# EAGLE board Qwiic_RFID_Tag-Panel (EAGLE 9.6.2), part 1 of 3
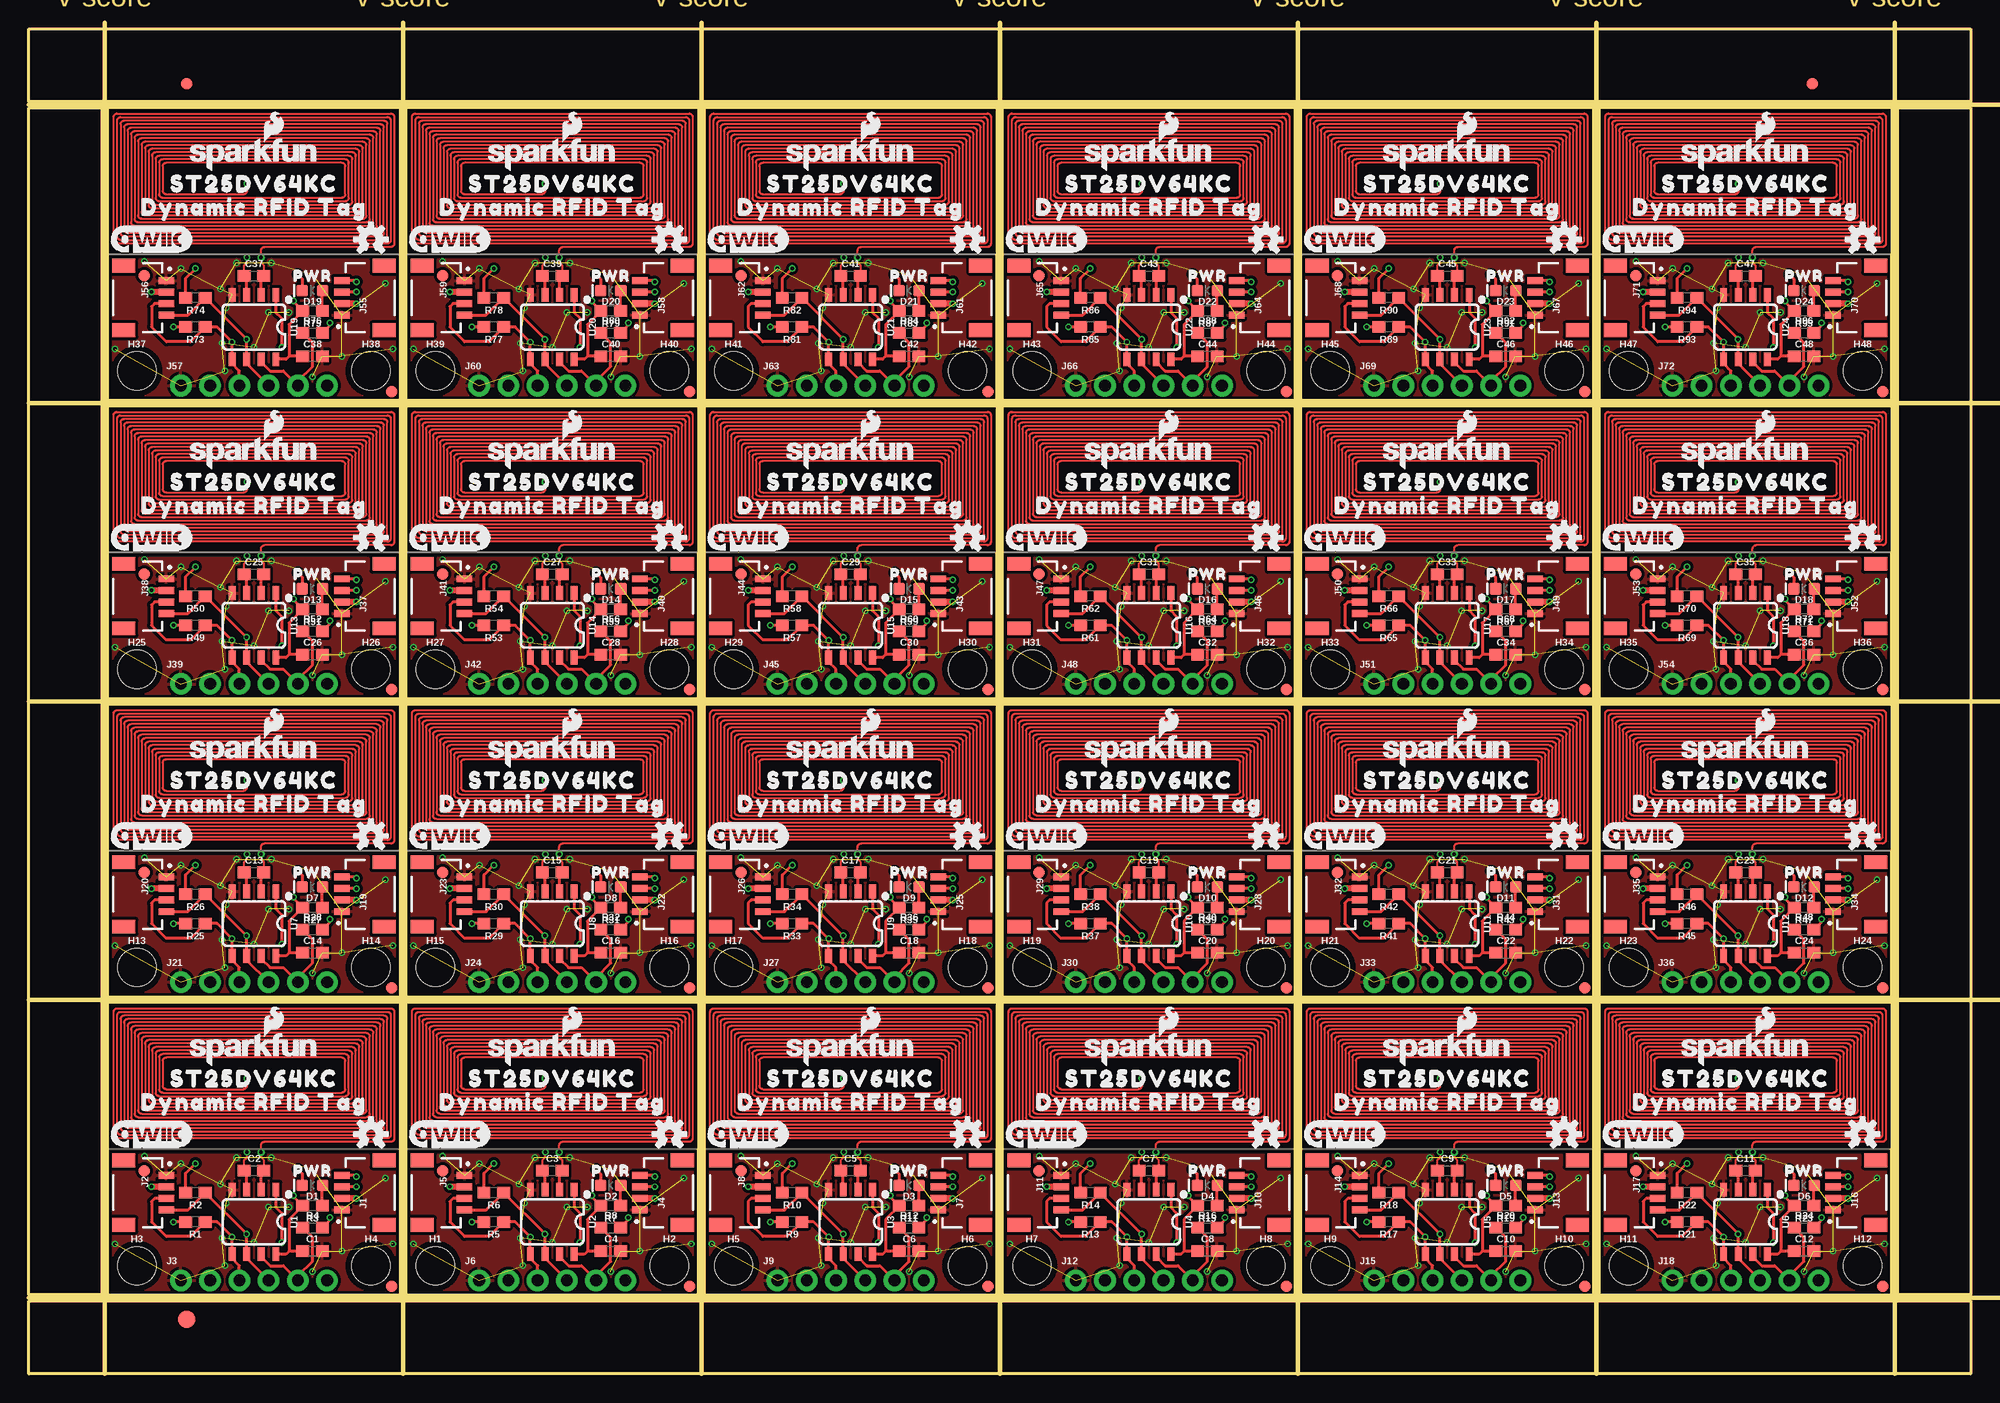
[diagram p0: board, top side]
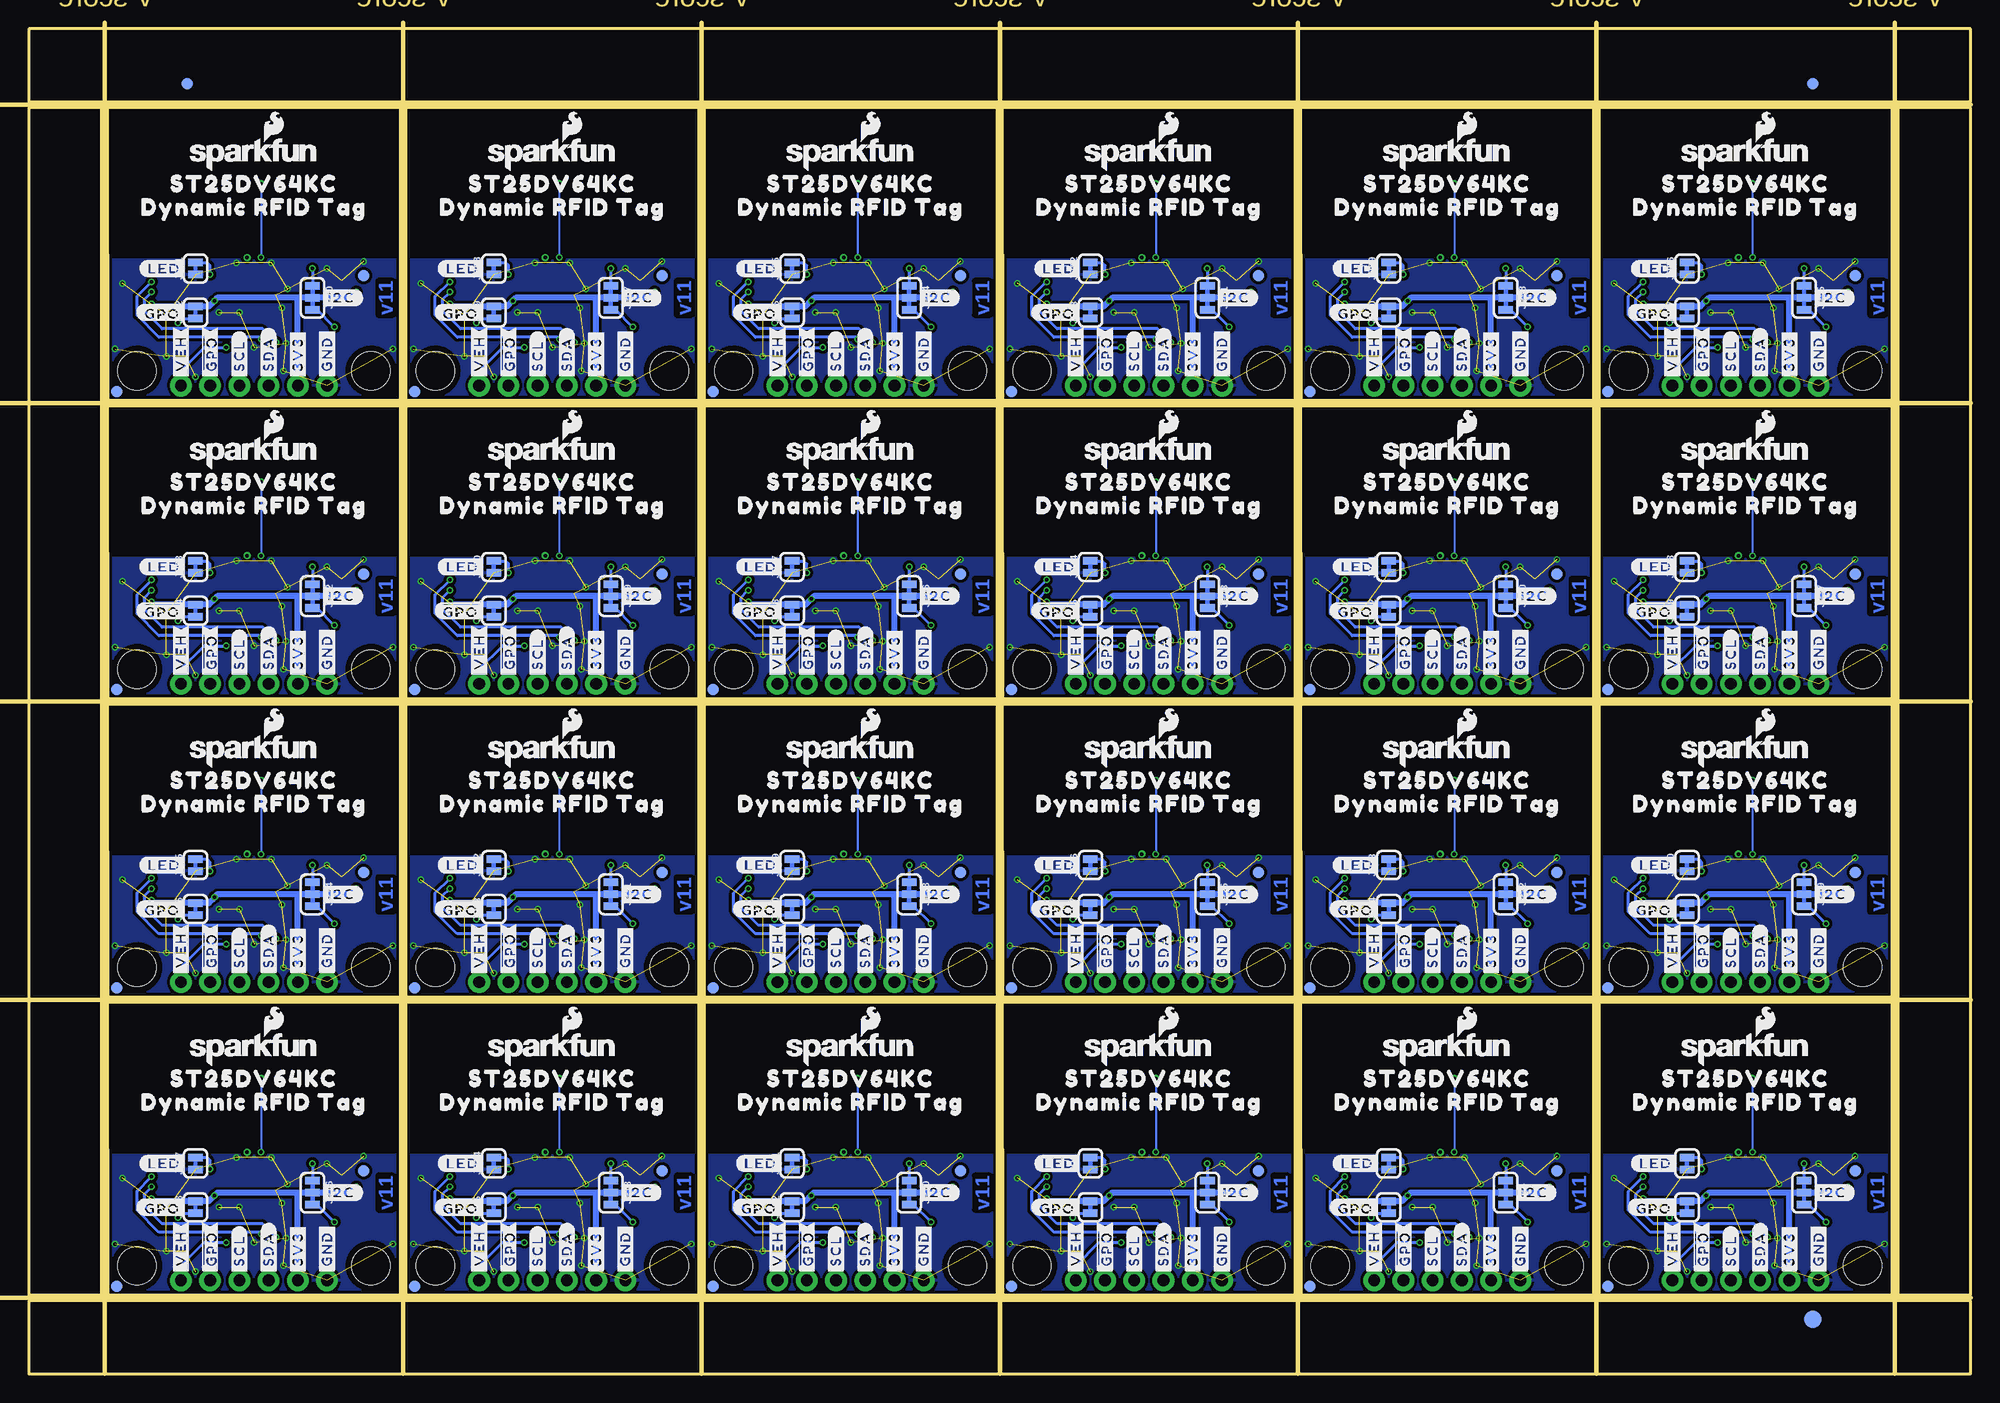
[diagram p1: board, bottom side, seen from below]

Size 168.66 x 116.84 mm. Coordinates in mm from the lower left corner, seen from the top.
Outline: 6.86,6.86 32.24,6.86 32.26,32.26 6.86,32.26 6.86,6.86
Outline: 32.77,6.86 58.15,6.86 58.17,32.26 32.77,32.26 32.77,6.86
Outline: 58.67,6.86 84.05,6.86 84.07,32.26 58.67,32.26 58.67,6.86
Outline: 84.58,6.86 109.96,6.86 109.98,32.26 84.58,32.26 84.58,6.86
Outline: 110.49,6.86 135.87,6.86 135.89,32.26 110.49,32.26 110.49,6.86
Outline: 136.4,6.86 161.78,6.86 161.8,32.26 136.4,32.26 136.4,6.86
Outline: 6.86,32.77 32.24,32.77 32.26,58.17 6.86,58.17 6.86,32.77
Outline: 32.77,32.77 58.15,32.77 58.17,58.17 32.77,58.17 32.77,32.77
Outline: 58.67,32.77 84.05,32.77 84.07,58.17 58.67,58.17 58.67,32.77
Outline: 84.58,32.77 109.96,32.77 109.98,58.17 84.58,58.17 84.58,32.77
Outline: 110.49,32.77 135.87,32.77 135.89,58.17 110.49,58.17 110.49,32.77
Outline: 136.4,32.77 161.78,32.77 161.8,58.17 136.4,58.17 136.4,32.77
Outline: 6.86,58.67 32.24,58.67 32.26,84.07 6.86,84.07 6.86,58.67
Outline: 32.77,58.67 58.15,58.67 58.17,84.07 32.77,84.07 32.77,58.67
Outline: 58.67,58.67 84.05,58.67 84.07,84.07 58.67,84.07 58.67,58.67
Outline: 84.58,58.67 109.96,58.67 109.98,84.07 84.58,84.07 84.58,58.67
Outline: 110.49,58.67 135.87,58.67 135.89,84.07 110.49,84.07 110.49,58.67
Outline: 136.4,58.67 161.78,58.67 161.8,84.07 136.4,84.07 136.4,58.67
Outline: 6.86,84.58 32.24,84.58 32.26,109.98 6.86,109.98 6.86,84.58
Outline: 32.77,84.58 58.15,84.58 58.17,109.98 32.77,109.98 32.77,84.58
Outline: 58.67,84.58 84.05,84.58 84.07,109.98 58.67,109.98 58.67,84.58
Outline: 84.58,84.58 109.96,84.58 109.98,109.98 84.58,109.98 84.58,84.58
Outline: 110.49,84.58 135.87,84.58 135.89,109.98 110.49,109.98 110.49,84.58
Outline: 136.4,84.58 161.78,84.58 161.8,109.98 136.4,109.98 136.4,84.58
Outline: 0,6.35 168.66,6.35 168.66,0 0,0 0,6.35
Outline: 162.31,109.98 168.66,109.98 168.66,6.86 162.31,6.86 162.31,109.98
Outline: 0,116.84 168.66,116.84 168.66,110.49 0,110.49 0,116.84
Outline: 0,109.98 6.35,109.98 6.35,6.86 0,6.86 0,109.98
Copper layers (1*16): Top 0.035mm / dielectric 1.5mm / Bottom 0.035mm
Design rules "Qwiic_RFID_Tag": minimum track width 5mil, minimum drill 0.3mm, track to track 5mil, track to pad 5mil, pad to pad 5mil, via to via 5mil, smd to smd 5mil, copper to edge 7mil, drill to drill 7mil, minimum pad ring 5mil, minimum via ring 5mil, stop-mask expansion 2.5mil, vias tented up to drill 25mil, thermal gap 10mil
Milling: 12 lines

## Footprints (pad centres in the part's own frame; a part is rotated, then mirrored left to right if it is on the bottom)
0603 = smd 1.1 x 1: 1 -0.85,0; 2 0.85,0
LED-0603 = smd 1 x 1: A -0.877,0; C 0.877,0
FIDUCIAL-1X2 = smd 1 x 1: 1 0,0
FIDUCIAL-1.5X3 = smd 1.5 x 1.5: 1 0,0
STAND-OFF = hole 3.302: 0,0
JST04_1MM_RA = smd 0.6 x 1.35: 1 -1.5,0; 2 -0.5,0; 3 0.5,0; 4 1.5,0 | smd 1.2 x 2: NC1 2.8,-3.675; NC2 -2.8,-3.675
1X06_NO_SILK = drill 1.016 pad 1.88: 1 0,0; 2 2.54,0; 3 5.08,0; 4 7.62,0; 5 10.16,0; 6 12.7,0
SMT-JUMPER_3_2-NC_TRACE_SILK = smd 0.66 x 1.27: 1 -1.041,0; 2 0,0; 3 1.041,0
SMT-JUMPER_2_NC_TRACE_SILK = smd 0.66 x 1.27: 1 -0.521,0; 2 0.521,0
PCB_COIL_4UH_B = drill 0.305 pad 0.61: IN1 -0.61,6.096; IN2 0.61,-0.305
SO08 = smd 0.6 x 1.2: 1 -1.905,-2.8; 2 -0.635,-2.8; 3 0.635,-2.8; 4 1.905,-2.8; 5 1.905,2.8; 6 0.635,2.8; 7 -0.635,2.8; 8 -1.905,2.8

## Placement (x,y rotation side)
C1  0.1uF  [0603]  24.64,10.67 0 top
C2  4.7pF  [0603]  19.56,17.65 0 top
C3  4.7pF  [0603]  45.47,17.65 0 top
C4  0.1uF  [0603]  50.55,10.67 0 top
C5  4.7pF  [0603]  71.37,17.65 0 top
C6  0.1uF  [0603]  76.45,10.67 0 top
C7  4.7pF  [0603]  97.28,17.65 0 top
C8  0.1uF  [0603]  102.36,10.67 0 top
C9  4.7pF  [0603]  123.19,17.65 0 top
C10  0.1uF  [0603]  128.27,10.67 0 top
C11  4.7pF  [0603]  149.1,17.65 0 top
C12  0.1uF  [0603]  154.18,10.67 0 top
C13  4.7pF  [0603]  19.56,43.56 0 top
C14  0.1uF  [0603]  24.64,36.58 0 top
C15  4.7pF  [0603]  45.47,43.56 0 top
C16  0.1uF  [0603]  50.55,36.58 0 top
C17  4.7pF  [0603]  71.37,43.56 0 top
C18  0.1uF  [0603]  76.45,36.58 0 top
C19  4.7pF  [0603]  97.28,43.56 0 top
C20  0.1uF  [0603]  102.36,36.58 0 top
C21  4.7pF  [0603]  123.19,43.56 0 top
C22  0.1uF  [0603]  128.27,36.58 0 top
C23  4.7pF  [0603]  149.1,43.56 0 top
C24  0.1uF  [0603]  154.18,36.58 0 top
C25  4.7pF  [0603]  19.56,69.47 0 top
C26  0.1uF  [0603]  24.64,62.48 0 top
C27  4.7pF  [0603]  45.47,69.47 0 top
C28  0.1uF  [0603]  50.55,62.48 0 top
C29  4.7pF  [0603]  71.37,69.47 0 top
C30  0.1uF  [0603]  76.45,62.48 0 top
C31  4.7pF  [0603]  97.28,69.47 0 top
C32  0.1uF  [0603]  102.36,62.48 0 top
C33  4.7pF  [0603]  123.19,69.47 0 top
C34  0.1uF  [0603]  128.27,62.48 0 top
C35  4.7pF  [0603]  149.1,69.47 0 top
C36  0.1uF  [0603]  154.18,62.48 0 top
C37  4.7pF  [0603]  19.56,95.38 0 top
C38  0.1uF  [0603]  24.64,88.39 0 top
C39  4.7pF  [0603]  45.47,95.38 0 top
C40  0.1uF  [0603]  50.55,88.39 0 top
C41  4.7pF  [0603]  71.37,95.38 0 top
C42  0.1uF  [0603]  76.45,88.39 0 top
C43  4.7pF  [0603]  97.28,95.38 0 top
C44  0.1uF  [0603]  102.36,88.39 0 top
C45  4.7pF  [0603]  123.19,95.38 0 top
C46  0.1uF  [0603]  128.27,88.39 0 top
C47  4.7pF  [0603]  149.1,95.38 0 top
C48  0.1uF  [0603]  154.18,88.39 0 top
D1  RED  [LED-0603]  24.64,16.38 180 top
D2  RED  [LED-0603]  50.55,16.38 180 top
D3  RED  [LED-0603]  76.45,16.38 180 top
D4  RED  [LED-0603]  102.36,16.38 180 top
D5  RED  [LED-0603]  128.27,16.38 180 top
D6  RED  [LED-0603]  154.18,16.38 180 top
D7  RED  [LED-0603]  24.64,42.29 180 top
D8  RED  [LED-0603]  50.55,42.29 180 top
D9  RED  [LED-0603]  76.45,42.29 180 top
D10  RED  [LED-0603]  102.36,42.29 180 top
D11  RED  [LED-0603]  128.27,42.29 180 top
D12  RED  [LED-0603]  154.18,42.29 180 top
D13  RED  [LED-0603]  24.64,68.2 180 top
D14  RED  [LED-0603]  50.55,68.2 180 top
D15  RED  [LED-0603]  76.45,68.2 180 top
D16  RED  [LED-0603]  102.36,68.2 180 top
D17  RED  [LED-0603]  128.27,68.2 180 top
D18  RED  [LED-0603]  154.18,68.2 180 top
D19  RED  [LED-0603]  24.64,94.11 180 top
D20  RED  [LED-0603]  50.55,94.11 180 top
D21  RED  [LED-0603]  76.45,94.11 180 top
D22  RED  [LED-0603]  102.36,94.11 180 top
D23  RED  [LED-0603]  128.27,94.11 180 top
D24  RED  [LED-0603]  154.18,94.11 180 top
E$1  [FIDUCIAL-1X2]  13.72,112.08 0 top
E$2  [FIDUCIAL-1X2]  13.72,112.08 0 bottom
E$3  [FIDUCIAL-1X2]  154.88,112.08 0 top
E$4  [FIDUCIAL-1X2]  154.88,112.08 0 bottom
E$5  [FIDUCIAL-1.5X3]  13.72,4.76 0 top
E$6  [FIDUCIAL-1.5X3]  13.72,4.76 0 bottom
FD1  FIDUCIAL1X2  [FIDUCIAL-1X2]  10.03,17.65 0 bottom
FD2  FIDUCIAL1X2  [FIDUCIAL-1X2]  10.03,17.65 0 top
FD3  FIDUCIAL1X2  [FIDUCIAL-1X2]  31.5,7.62 0 bottom
FD4  FIDUCIAL1X2  [FIDUCIAL-1X2]  31.5,7.62 0 top
FD5  FIDUCIAL1X2  [FIDUCIAL-1X2]  35.94,17.65 0 bottom
FD6  FIDUCIAL1X2  [FIDUCIAL-1X2]  35.94,17.65 0 top
FD7  FIDUCIAL1X2  [FIDUCIAL-1X2]  57.4,7.62 0 bottom
FD8  FIDUCIAL1X2  [FIDUCIAL-1X2]  57.4,7.62 0 top
FD9  FIDUCIAL1X2  [FIDUCIAL-1X2]  61.85,17.65 0 bottom
FD10  FIDUCIAL1X2  [FIDUCIAL-1X2]  61.85,17.65 0 top
FD11  FIDUCIAL1X2  [FIDUCIAL-1X2]  83.31,7.62 0 bottom
FD12  FIDUCIAL1X2  [FIDUCIAL-1X2]  83.31,7.62 0 top
FD13  FIDUCIAL1X2  [FIDUCIAL-1X2]  87.76,17.65 0 bottom
FD14  FIDUCIAL1X2  [FIDUCIAL-1X2]  87.76,17.65 0 top
FD15  FIDUCIAL1X2  [FIDUCIAL-1X2]  109.22,7.62 0 bottom
FD16  FIDUCIAL1X2  [FIDUCIAL-1X2]  109.22,7.62 0 top
FD17  FIDUCIAL1X2  [FIDUCIAL-1X2]  113.67,17.65 0 bottom
FD18  FIDUCIAL1X2  [FIDUCIAL-1X2]  113.67,17.65 0 top
FD19  FIDUCIAL1X2  [FIDUCIAL-1X2]  135.13,7.62 0 bottom
FD20  FIDUCIAL1X2  [FIDUCIAL-1X2]  135.13,7.62 0 top
FD21  FIDUCIAL1X2  [FIDUCIAL-1X2]  139.57,17.65 0 bottom
FD22  FIDUCIAL1X2  [FIDUCIAL-1X2]  139.57,17.65 0 top
FD23  FIDUCIAL1X2  [FIDUCIAL-1X2]  161.04,7.62 0 bottom
FD24  FIDUCIAL1X2  [FIDUCIAL-1X2]  161.04,7.62 0 top
FD25  FIDUCIAL1X2  [FIDUCIAL-1X2]  10.03,43.56 0 bottom
FD26  FIDUCIAL1X2  [FIDUCIAL-1X2]  10.03,43.56 0 top
FD27  FIDUCIAL1X2  [FIDUCIAL-1X2]  31.5,33.53 0 bottom
FD28  FIDUCIAL1X2  [FIDUCIAL-1X2]  31.5,33.53 0 top
FD29  FIDUCIAL1X2  [FIDUCIAL-1X2]  35.94,43.56 0 bottom
FD30  FIDUCIAL1X2  [FIDUCIAL-1X2]  35.94,43.56 0 top
FD31  FIDUCIAL1X2  [FIDUCIAL-1X2]  57.4,33.53 0 bottom
FD32  FIDUCIAL1X2  [FIDUCIAL-1X2]  57.4,33.53 0 top
FD33  FIDUCIAL1X2  [FIDUCIAL-1X2]  61.85,43.56 0 bottom
FD34  FIDUCIAL1X2  [FIDUCIAL-1X2]  61.85,43.56 0 top
FD35  FIDUCIAL1X2  [FIDUCIAL-1X2]  83.31,33.53 0 bottom
FD36  FIDUCIAL1X2  [FIDUCIAL-1X2]  83.31,33.53 0 top
FD37  FIDUCIAL1X2  [FIDUCIAL-1X2]  87.76,43.56 0 bottom
FD38  FIDUCIAL1X2  [FIDUCIAL-1X2]  87.76,43.56 0 top
FD39  FIDUCIAL1X2  [FIDUCIAL-1X2]  109.22,33.53 0 bottom
FD40  FIDUCIAL1X2  [FIDUCIAL-1X2]  109.22,33.53 0 top
FD41  FIDUCIAL1X2  [FIDUCIAL-1X2]  113.67,43.56 0 bottom
FD42  FIDUCIAL1X2  [FIDUCIAL-1X2]  113.67,43.56 0 top
FD43  FIDUCIAL1X2  [FIDUCIAL-1X2]  135.13,33.53 0 bottom
FD44  FIDUCIAL1X2  [FIDUCIAL-1X2]  135.13,33.53 0 top
FD45  FIDUCIAL1X2  [FIDUCIAL-1X2]  139.57,43.56 0 bottom
FD46  FIDUCIAL1X2  [FIDUCIAL-1X2]  139.57,43.56 0 top
FD47  FIDUCIAL1X2  [FIDUCIAL-1X2]  161.04,33.53 0 bottom
FD48  FIDUCIAL1X2  [FIDUCIAL-1X2]  161.04,33.53 0 top
FD49  FIDUCIAL1X2  [FIDUCIAL-1X2]  10.03,69.47 0 bottom
FD50  FIDUCIAL1X2  [FIDUCIAL-1X2]  10.03,69.47 0 top
FD51  FIDUCIAL1X2  [FIDUCIAL-1X2]  31.5,59.44 0 bottom
FD52  FIDUCIAL1X2  [FIDUCIAL-1X2]  31.5,59.44 0 top
FD53  FIDUCIAL1X2  [FIDUCIAL-1X2]  35.94,69.47 0 bottom
FD54  FIDUCIAL1X2  [FIDUCIAL-1X2]  35.94,69.47 0 top
FD55  FIDUCIAL1X2  [FIDUCIAL-1X2]  57.4,59.44 0 bottom
FD56  FIDUCIAL1X2  [FIDUCIAL-1X2]  57.4,59.44 0 top
FD57  FIDUCIAL1X2  [FIDUCIAL-1X2]  61.85,69.47 0 bottom
FD58  FIDUCIAL1X2  [FIDUCIAL-1X2]  61.85,69.47 0 top
FD59  FIDUCIAL1X2  [FIDUCIAL-1X2]  83.31,59.44 0 bottom
FD60  FIDUCIAL1X2  [FIDUCIAL-1X2]  83.31,59.44 0 top
FD61  FIDUCIAL1X2  [FIDUCIAL-1X2]  87.76,69.47 0 bottom
FD62  FIDUCIAL1X2  [FIDUCIAL-1X2]  87.76,69.47 0 top
FD63  FIDUCIAL1X2  [FIDUCIAL-1X2]  109.22,59.44 0 bottom
FD64  FIDUCIAL1X2  [FIDUCIAL-1X2]  109.22,59.44 0 top
FD65  FIDUCIAL1X2  [FIDUCIAL-1X2]  113.67,69.47 0 bottom
FD66  FIDUCIAL1X2  [FIDUCIAL-1X2]  113.67,69.47 0 top
FD67  FIDUCIAL1X2  [FIDUCIAL-1X2]  135.13,59.44 0 bottom
FD68  FIDUCIAL1X2  [FIDUCIAL-1X2]  135.13,59.44 0 top
FD69  FIDUCIAL1X2  [FIDUCIAL-1X2]  139.57,69.47 0 bottom
FD70  FIDUCIAL1X2  [FIDUCIAL-1X2]  139.57,69.47 0 top
FD71  FIDUCIAL1X2  [FIDUCIAL-1X2]  161.04,59.44 0 bottom
FD72  FIDUCIAL1X2  [FIDUCIAL-1X2]  161.04,59.44 0 top
FD73  FIDUCIAL1X2  [FIDUCIAL-1X2]  10.03,95.38 0 bottom
FD74  FIDUCIAL1X2  [FIDUCIAL-1X2]  10.03,95.38 0 top
FD75  FIDUCIAL1X2  [FIDUCIAL-1X2]  31.5,85.34 0 bottom
FD76  FIDUCIAL1X2  [FIDUCIAL-1X2]  31.5,85.34 0 top
FD77  FIDUCIAL1X2  [FIDUCIAL-1X2]  35.94,95.38 0 bottom
FD78  FIDUCIAL1X2  [FIDUCIAL-1X2]  35.94,95.38 0 top
FD79  FIDUCIAL1X2  [FIDUCIAL-1X2]  57.4,85.34 0 bottom
FD80  FIDUCIAL1X2  [FIDUCIAL-1X2]  57.4,85.34 0 top
FD81  FIDUCIAL1X2  [FIDUCIAL-1X2]  61.85,95.38 0 bottom
FD82  FIDUCIAL1X2  [FIDUCIAL-1X2]  61.85,95.38 0 top
FD83  FIDUCIAL1X2  [FIDUCIAL-1X2]  83.31,85.34 0 bottom
FD84  FIDUCIAL1X2  [FIDUCIAL-1X2]  83.31,85.34 0 top
FD85  FIDUCIAL1X2  [FIDUCIAL-1X2]  87.76,95.38 0 bottom
FD86  FIDUCIAL1X2  [FIDUCIAL-1X2]  87.76,95.38 0 top
FD87  FIDUCIAL1X2  [FIDUCIAL-1X2]  109.22,85.34 0 bottom
FD88  FIDUCIAL1X2  [FIDUCIAL-1X2]  109.22,85.34 0 top
FD89  FIDUCIAL1X2  [FIDUCIAL-1X2]  113.67,95.38 0 bottom
FD90  FIDUCIAL1X2  [FIDUCIAL-1X2]  113.67,95.38 0 top
FD91  FIDUCIAL1X2  [FIDUCIAL-1X2]  135.13,85.34 0 bottom
FD92  FIDUCIAL1X2  [FIDUCIAL-1X2]  135.13,85.34 0 top
FD93  FIDUCIAL1X2  [FIDUCIAL-1X2]  139.57,95.38 0 bottom
FD94  FIDUCIAL1X2  [FIDUCIAL-1X2]  139.57,95.38 0 top
FD95  FIDUCIAL1X2  [FIDUCIAL-1X2]  161.04,85.34 0 bottom
FD96  FIDUCIAL1X2  [FIDUCIAL-1X2]  161.04,85.34 0 top
H1  STAND-OFF  [STAND-OFF]  35.31,9.4 0 top
H2  STAND-OFF  [STAND-OFF]  55.63,9.4 0 top
H3  STAND-OFF  [STAND-OFF]  9.4,9.4 0 top
H4  STAND-OFF  [STAND-OFF]  29.72,9.4 0 top
H5  STAND-OFF  [STAND-OFF]  61.21,9.4 0 top
H6  STAND-OFF  [STAND-OFF]  81.53,9.4 0 top
H7  STAND-OFF  [STAND-OFF]  87.12,9.4 0 top
H8  STAND-OFF  [STAND-OFF]  107.44,9.4 0 top
H9  STAND-OFF  [STAND-OFF]  113.03,9.4 0 top
H10  STAND-OFF  [STAND-OFF]  133.35,9.4 0 top
H11  STAND-OFF  [STAND-OFF]  138.94,9.4 0 top
H12  STAND-OFF  [STAND-OFF]  159.26,9.4 0 top
H13  STAND-OFF  [STAND-OFF]  9.4,35.31 0 top
H14  STAND-OFF  [STAND-OFF]  29.72,35.31 0 top
H15  STAND-OFF  [STAND-OFF]  35.31,35.31 0 top
H16  STAND-OFF  [STAND-OFF]  55.63,35.31 0 top
H17  STAND-OFF  [STAND-OFF]  61.21,35.31 0 top
H18  STAND-OFF  [STAND-OFF]  81.53,35.31 0 top
H19  STAND-OFF  [STAND-OFF]  87.12,35.31 0 top
H20  STAND-OFF  [STAND-OFF]  107.44,35.31 0 top
H21  STAND-OFF  [STAND-OFF]  113.03,35.31 0 top
H22  STAND-OFF  [STAND-OFF]  133.35,35.31 0 top
H23  STAND-OFF  [STAND-OFF]  138.94,35.31 0 top
H24  STAND-OFF  [STAND-OFF]  159.26,35.31 0 top
H25  STAND-OFF  [STAND-OFF]  9.4,61.21 0 top
H26  STAND-OFF  [STAND-OFF]  29.72,61.21 0 top
H27  STAND-OFF  [STAND-OFF]  35.31,61.21 0 top
H28  STAND-OFF  [STAND-OFF]  55.63,61.21 0 top
H29  STAND-OFF  [STAND-OFF]  61.21,61.21 0 top
H30  STAND-OFF  [STAND-OFF]  81.53,61.21 0 top
H31  STAND-OFF  [STAND-OFF]  87.12,61.21 0 top
H32  STAND-OFF  [STAND-OFF]  107.44,61.21 0 top
H33  STAND-OFF  [STAND-OFF]  113.03,61.21 0 top
H34  STAND-OFF  [STAND-OFF]  133.35,61.21 0 top
H35  STAND-OFF  [STAND-OFF]  138.94,61.21 0 top
H36  STAND-OFF  [STAND-OFF]  159.26,61.21 0 top
H37  STAND-OFF  [STAND-OFF]  9.4,87.12 0 top
H38  STAND-OFF  [STAND-OFF]  29.72,87.12 0 top
H39  STAND-OFF  [STAND-OFF]  35.31,87.12 0 top
H40  STAND-OFF  [STAND-OFF]  55.63,87.12 0 top
H41  STAND-OFF  [STAND-OFF]  61.21,87.12 0 top
H42  STAND-OFF  [STAND-OFF]  81.53,87.12 0 top
H43  STAND-OFF  [STAND-OFF]  87.12,87.12 0 top
H44  STAND-OFF  [STAND-OFF]  107.44,87.12 0 top
H45  STAND-OFF  [STAND-OFF]  113.03,87.12 0 top
H46  STAND-OFF  [STAND-OFF]  133.35,87.12 0 top
H47  STAND-OFF  [STAND-OFF]  138.94,87.12 0 top
H48  STAND-OFF  [STAND-OFF]  159.26,87.12 0 top
J1  Qwiic  [JST04_1MM_RA]  27.18,15.75 90 top
J2  Qwiic  [JST04_1MM_RA]  11.94,15.75 270 top
J3  [1X06_NO_SILK]  13.21,8.13 0 top
J4  Qwiic  [JST04_1MM_RA]  53.09,15.75 90 top
J5  Qwiic  [JST04_1MM_RA]  37.85,15.75 270 top
J6  [1X06_NO_SILK]  39.12,8.13 0 top
J7  Qwiic  [JST04_1MM_RA]  78.99,15.75 90 top
J8  Qwiic  [JST04_1MM_RA]  63.75,15.75 270 top
J9  [1X06_NO_SILK]  65.02,8.13 0 top
J10  Qwiic  [JST04_1MM_RA]  104.9,15.75 90 top
J11  Qwiic  [JST04_1MM_RA]  89.66,15.75 270 top
J12  [1X06_NO_SILK]  90.93,8.13 0 top
J13  Qwiic  [JST04_1MM_RA]  130.81,15.75 90 top
J14  Qwiic  [JST04_1MM_RA]  115.57,15.75 270 top
J15  [1X06_NO_SILK]  116.84,8.13 0 top
J16  Qwiic  [JST04_1MM_RA]  156.72,15.75 90 top
J17  Qwiic  [JST04_1MM_RA]  141.48,15.75 270 top
J18  [1X06_NO_SILK]  142.75,8.13 0 top
J19  Qwiic  [JST04_1MM_RA]  27.18,41.66 90 top
J20  Qwiic  [JST04_1MM_RA]  11.94,41.66 270 top
J21  [1X06_NO_SILK]  13.21,34.04 0 top
J22  Qwiic  [JST04_1MM_RA]  53.09,41.66 90 top
J23  Qwiic  [JST04_1MM_RA]  37.85,41.66 270 top
J24  [1X06_NO_SILK]  39.12,34.04 0 top
J25  Qwiic  [JST04_1MM_RA]  78.99,41.66 90 top
J26  Qwiic  [JST04_1MM_RA]  63.75,41.66 270 top
J27  [1X06_NO_SILK]  65.02,34.04 0 top
J28  Qwiic  [JST04_1MM_RA]  104.9,41.66 90 top
J29  Qwiic  [JST04_1MM_RA]  89.66,41.66 270 top
J30  [1X06_NO_SILK]  90.93,34.04 0 top
J31  Qwiic  [JST04_1MM_RA]  130.81,41.66 90 top
J32  Qwiic  [JST04_1MM_RA]  115.57,41.66 270 top
J33  [1X06_NO_SILK]  116.84,34.04 0 top
J34  Qwiic  [JST04_1MM_RA]  156.72,41.66 90 top
J35  Qwiic  [JST04_1MM_RA]  141.48,41.66 270 top
J36  [1X06_NO_SILK]  142.75,34.04 0 top
J37  Qwiic  [JST04_1MM_RA]  27.18,67.56 90 top
J38  Qwiic  [JST04_1MM_RA]  11.94,67.56 270 top
J39  [1X06_NO_SILK]  13.21,59.94 0 top
J40  Qwiic  [JST04_1MM_RA]  53.09,67.56 90 top
J41  Qwiic  [JST04_1MM_RA]  37.85,67.56 270 top
J42  [1X06_NO_SILK]  39.12,59.94 0 top
J43  Qwiic  [JST04_1MM_RA]  78.99,67.56 90 top
J44  Qwiic  [JST04_1MM_RA]  63.75,67.56 270 top
J45  [1X06_NO_SILK]  65.02,59.94 0 top
J46  Qwiic  [JST04_1MM_RA]  104.9,67.56 90 top
J47  Qwiic  [JST04_1MM_RA]  89.66,67.56 270 top
J48  [1X06_NO_SILK]  90.93,59.94 0 top
J49  Qwiic  [JST04_1MM_RA]  130.81,67.56 90 top
J50  Qwiic  [JST04_1MM_RA]  115.57,67.56 270 top
J51  [1X06_NO_SILK]  116.84,59.94 0 top
J52  Qwiic  [JST04_1MM_RA]  156.72,67.56 90 top
J53  Qwiic  [JST04_1MM_RA]  141.48,67.56 270 top
J54  [1X06_NO_SILK]  142.75,59.94 0 top
J55  Qwiic  [JST04_1MM_RA]  27.18,93.47 90 top
J56  Qwiic  [JST04_1MM_RA]  11.94,93.47 270 top
J57  [1X06_NO_SILK]  13.21,85.85 0 top
J58  Qwiic  [JST04_1MM_RA]  53.09,93.47 90 top
J59  Qwiic  [JST04_1MM_RA]  37.85,93.47 270 top
J60  [1X06_NO_SILK]  39.12,85.85 0 top
J61  Qwiic  [JST04_1MM_RA]  78.99,93.47 90 top
J62  Qwiic  [JST04_1MM_RA]  63.75,93.47 270 top
J63  [1X06_NO_SILK]  65.02,85.85 0 top
J64  Qwiic  [JST04_1MM_RA]  104.9,93.47 90 top
J65  Qwiic  [JST04_1MM_RA]  89.66,93.47 270 top
J66  [1X06_NO_SILK]  90.93,85.85 0 top
J67  Qwiic  [JST04_1MM_RA]  130.81,93.47 90 top
J68  Qwiic  [JST04_1MM_RA]  115.57,93.47 270 top
J69  [1X06_NO_SILK]  116.84,85.85 0 top
J70  Qwiic  [JST04_1MM_RA]  156.72,93.47 90 top
J71  Qwiic  [JST04_1MM_RA]  141.48,93.47 270 top
J72  [1X06_NO_SILK]  142.75,85.85 0 top
JP1  JUMPER-SMT_3_2-NC_TRACE_SILK  [SMT-JUMPER_3_2-NC_TRACE_SILK]  14.48,15.75 270 bottom
JP2  JUMPER-SMT_2_NC_TRACE_SILK  [SMT-JUMPER_2_NC_TRACE_SILK]  24.64,14.48 90 bottom
JP3  JUMPER-SMT_2_NC_TRACE_SILK  [SMT-JUMPER_2_NC_TRACE_SILK]  24.64,18.29 90 bottom
JP4  JUMPER-SMT_3_2-NC_TRACE_SILK  [SMT-JUMPER_3_2-NC_TRACE_SILK]  40.39,15.75 270 bottom
JP5  JUMPER-SMT_2_NC_TRACE_SILK  [SMT-JUMPER_2_NC_TRACE_SILK]  50.55,18.29 90 bottom
JP6  JUMPER-SMT_2_NC_TRACE_SILK  [SMT-JUMPER_2_NC_TRACE_SILK]  50.55,14.48 90 bottom
JP7  JUMPER-SMT_3_2-NC_TRACE_SILK  [SMT-JUMPER_3_2-NC_TRACE_SILK]  66.29,15.75 270 bottom
JP8  JUMPER-SMT_2_NC_TRACE_SILK  [SMT-JUMPER_2_NC_TRACE_SILK]  76.45,18.29 90 bottom
JP9  JUMPER-SMT_2_NC_TRACE_SILK  [SMT-JUMPER_2_NC_TRACE_SILK]  76.45,14.48 90 bottom
JP10  JUMPER-SMT_3_2-NC_TRACE_SILK  [SMT-JUMPER_3_2-NC_TRACE_SILK]  92.2,15.75 270 bottom
JP11  JUMPER-SMT_2_NC_TRACE_SILK  [SMT-JUMPER_2_NC_TRACE_SILK]  102.36,18.29 90 bottom
JP12  JUMPER-SMT_2_NC_TRACE_SILK  [SMT-JUMPER_2_NC_TRACE_SILK]  102.36,14.48 90 bottom
JP13  JUMPER-SMT_3_2-NC_TRACE_SILK  [SMT-JUMPER_3_2-NC_TRACE_SILK]  118.11,15.75 270 bottom
JP14  JUMPER-SMT_2_NC_TRACE_SILK  [SMT-JUMPER_2_NC_TRACE_SILK]  128.27,18.29 90 bottom
JP15  JUMPER-SMT_2_NC_TRACE_SILK  [SMT-JUMPER_2_NC_TRACE_SILK]  128.27,14.48 90 bottom
JP16  JUMPER-SMT_3_2-NC_TRACE_SILK  [SMT-JUMPER_3_2-NC_TRACE_SILK]  144.02,15.75 270 bottom
JP17  JUMPER-SMT_2_NC_TRACE_SILK  [SMT-JUMPER_2_NC_TRACE_SILK]  154.18,18.29 90 bottom
JP18  JUMPER-SMT_2_NC_TRACE_SILK  [SMT-JUMPER_2_NC_TRACE_SILK]  154.18,14.48 90 bottom
JP19  JUMPER-SMT_3_2-NC_TRACE_SILK  [SMT-JUMPER_3_2-NC_TRACE_SILK]  14.48,41.66 270 bottom
JP20  JUMPER-SMT_2_NC_TRACE_SILK  [SMT-JUMPER_2_NC_TRACE_SILK]  24.64,44.2 90 bottom
JP21  JUMPER-SMT_2_NC_TRACE_SILK  [SMT-JUMPER_2_NC_TRACE_SILK]  24.64,40.39 90 bottom
JP22  JUMPER-SMT_3_2-NC_TRACE_SILK  [SMT-JUMPER_3_2-NC_TRACE_SILK]  40.39,41.66 270 bottom
JP23  JUMPER-SMT_2_NC_TRACE_SILK  [SMT-JUMPER_2_NC_TRACE_SILK]  50.55,44.2 90 bottom
JP24  JUMPER-SMT_2_NC_TRACE_SILK  [SMT-JUMPER_2_NC_TRACE_SILK]  50.55,40.39 90 bottom
JP25  JUMPER-SMT_3_2-NC_TRACE_SILK  [SMT-JUMPER_3_2-NC_TRACE_SILK]  66.29,41.66 270 bottom
JP26  JUMPER-SMT_2_NC_TRACE_SILK  [SMT-JUMPER_2_NC_TRACE_SILK]  76.45,44.2 90 bottom
JP27  JUMPER-SMT_2_NC_TRACE_SILK  [SMT-JUMPER_2_NC_TRACE_SILK]  76.45,40.39 90 bottom
JP28  JUMPER-SMT_3_2-NC_TRACE_SILK  [SMT-JUMPER_3_2-NC_TRACE_SILK]  92.2,41.66 270 bottom
JP29  JUMPER-SMT_2_NC_TRACE_SILK  [SMT-JUMPER_2_NC_TRACE_SILK]  102.36,44.2 90 bottom
JP30  JUMPER-SMT_2_NC_TRACE_SILK  [SMT-JUMPER_2_NC_TRACE_SILK]  102.36,40.39 90 bottom
JP31  JUMPER-SMT_3_2-NC_TRACE_SILK  [SMT-JUMPER_3_2-NC_TRACE_SILK]  118.11,41.66 270 bottom
JP32  JUMPER-SMT_2_NC_TRACE_SILK  [SMT-JUMPER_2_NC_TRACE_SILK]  128.27,44.2 90 bottom
JP33  JUMPER-SMT_2_NC_TRACE_SILK  [SMT-JUMPER_2_NC_TRACE_SILK]  128.27,40.39 90 bottom
JP34  JUMPER-SMT_3_2-NC_TRACE_SILK  [SMT-JUMPER_3_2-NC_TRACE_SILK]  144.02,41.66 270 bottom
JP35  JUMPER-SMT_2_NC_TRACE_SILK  [SMT-JUMPER_2_NC_TRACE_SILK]  154.18,44.2 90 bottom
JP36  JUMPER-SMT_2_NC_TRACE_SILK  [SMT-JUMPER_2_NC_TRACE_SILK]  154.18,40.39 90 bottom
JP37  JUMPER-SMT_3_2-NC_TRACE_SILK  [SMT-JUMPER_3_2-NC_TRACE_SILK]  14.48,67.56 270 bottom
JP38  JUMPER-SMT_2_NC_TRACE_SILK  [SMT-JUMPER_2_NC_TRACE_SILK]  24.64,70.1 90 bottom
JP39  JUMPER-SMT_2_NC_TRACE_SILK  [SMT-JUMPER_2_NC_TRACE_SILK]  24.64,66.29 90 bottom
JP40  JUMPER-SMT_3_2-NC_TRACE_SILK  [SMT-JUMPER_3_2-NC_TRACE_SILK]  40.39,67.56 270 bottom
JP41  JUMPER-SMT_2_NC_TRACE_SILK  [SMT-JUMPER_2_NC_TRACE_SILK]  50.55,70.1 90 bottom
JP42  JUMPER-SMT_2_NC_TRACE_SILK  [SMT-JUMPER_2_NC_TRACE_SILK]  50.55,66.29 90 bottom
JP43  JUMPER-SMT_3_2-NC_TRACE_SILK  [SMT-JUMPER_3_2-NC_TRACE_SILK]  66.29,67.56 270 bottom
JP44  JUMPER-SMT_2_NC_TRACE_SILK  [SMT-JUMPER_2_NC_TRACE_SILK]  76.45,70.1 90 bottom
JP45  JUMPER-SMT_2_NC_TRACE_SILK  [SMT-JUMPER_2_NC_TRACE_SILK]  76.45,66.29 90 bottom
JP46  JUMPER-SMT_3_2-NC_TRACE_SILK  [SMT-JUMPER_3_2-NC_TRACE_SILK]  92.2,67.56 270 bottom
JP47  JUMPER-SMT_2_NC_TRACE_SILK  [SMT-JUMPER_2_NC_TRACE_SILK]  102.36,70.1 90 bottom
JP48  JUMPER-SMT_2_NC_TRACE_SILK  [SMT-JUMPER_2_NC_TRACE_SILK]  102.36,66.29 90 bottom
JP49  JUMPER-SMT_3_2-NC_TRACE_SILK  [SMT-JUMPER_3_2-NC_TRACE_SILK]  118.11,67.56 270 bottom
JP50  JUMPER-SMT_2_NC_TRACE_SILK  [SMT-JUMPER_2_NC_TRACE_SILK]  128.27,70.1 90 bottom
JP51  JUMPER-SMT_2_NC_TRACE_SILK  [SMT-JUMPER_2_NC_TRACE_SILK]  128.27,66.29 90 bottom
JP52  JUMPER-SMT_3_2-NC_TRACE_SILK  [SMT-JUMPER_3_2-NC_TRACE_SILK]  144.02,67.56 270 bottom
JP53  JUMPER-SMT_2_NC_TRACE_SILK  [SMT-JUMPER_2_NC_TRACE_SILK]  154.18,70.1 90 bottom
JP54  JUMPER-SMT_2_NC_TRACE_SILK  [SMT-JUMPER_2_NC_TRACE_SILK]  154.18,66.29 90 bottom
JP55  JUMPER-SMT_3_2-NC_TRACE_SILK  [SMT-JUMPER_3_2-NC_TRACE_SILK]  14.48,93.47 270 bottom
JP56  JUMPER-SMT_2_NC_TRACE_SILK  [SMT-JUMPER_2_NC_TRACE_SILK]  24.64,96.01 90 bottom
JP57  JUMPER-SMT_2_NC_TRACE_SILK  [SMT-JUMPER_2_NC_TRACE_SILK]  24.64,92.2 90 bottom
JP58  JUMPER-SMT_3_2-NC_TRACE_SILK  [SMT-JUMPER_3_2-NC_TRACE_SILK]  40.39,93.47 270 bottom
JP59  JUMPER-SMT_2_NC_TRACE_SILK  [SMT-JUMPER_2_NC_TRACE_SILK]  50.55,96.01 90 bottom
JP60  JUMPER-SMT_2_NC_TRACE_SILK  [SMT-JUMPER_2_NC_TRACE_SILK]  50.55,92.2 90 bottom
JP61  JUMPER-SMT_3_2-NC_TRACE_SILK  [SMT-JUMPER_3_2-NC_TRACE_SILK]  66.29,93.47 270 bottom
JP62  JUMPER-SMT_2_NC_TRACE_SILK  [SMT-JUMPER_2_NC_TRACE_SILK]  76.45,96.01 90 bottom
JP63  JUMPER-SMT_2_NC_TRACE_SILK  [SMT-JUMPER_2_NC_TRACE_SILK]  76.45,92.2 90 bottom
JP64  JUMPER-SMT_3_2-NC_TRACE_SILK  [SMT-JUMPER_3_2-NC_TRACE_SILK]  92.2,93.47 270 bottom
JP65  JUMPER-SMT_2_NC_TRACE_SILK  [SMT-JUMPER_2_NC_TRACE_SILK]  102.36,96.01 90 bottom
JP66  JUMPER-SMT_2_NC_TRACE_SILK  [SMT-JUMPER_2_NC_TRACE_SILK]  102.36,92.2 90 bottom
JP67  JUMPER-SMT_3_2-NC_TRACE_SILK  [SMT-JUMPER_3_2-NC_TRACE_SILK]  118.11,93.47 270 bottom
JP68  JUMPER-SMT_2_NC_TRACE_SILK  [SMT-JUMPER_2_NC_TRACE_SILK]  128.27,96.01 90 bottom
JP69  JUMPER-SMT_2_NC_TRACE_SILK  [SMT-JUMPER_2_NC_TRACE_SILK]  128.27,92.2 90 bottom
JP70  JUMPER-SMT_3_2-NC_TRACE_SILK  [SMT-JUMPER_3_2-NC_TRACE_SILK]  144.02,93.47 270 bottom
JP71  JUMPER-SMT_2_NC_TRACE_SILK  [SMT-JUMPER_2_NC_TRACE_SILK]  154.18,96.01 90 bottom
JP72  JUMPER-SMT_2_NC_TRACE_SILK  [SMT-JUMPER_2_NC_TRACE_SILK]  154.18,92.2 90 bottom
L1  PCB_COIL_4UH_B  [PCB_COIL_4UH_B]  19.56,19.56 0 top
L2  PCB_COIL_4UH_B  [PCB_COIL_4UH_B]  45.47,19.56 0 top
L3  PCB_COIL_4UH_B  [PCB_COIL_4UH_B]  71.37,19.56 0 top
L4  PCB_COIL_4UH_B  [PCB_COIL_4UH_B]  97.28,19.56 0 top
L5  PCB_COIL_4UH_B  [PCB_COIL_4UH_B]  123.19,19.56 0 top
L6  PCB_COIL_4UH_B  [PCB_COIL_4UH_B]  149.1,19.56 0 top
L7  PCB_COIL_4UH_B  [PCB_COIL_4UH_B]  19.56,45.47 0 top
L8  PCB_COIL_4UH_B  [PCB_COIL_4UH_B]  45.47,45.47 0 top
L9  PCB_COIL_4UH_B  [PCB_COIL_4UH_B]  71.37,45.47 0 top
L10  PCB_COIL_4UH_B  [PCB_COIL_4UH_B]  97.28,45.47 0 top
L11  PCB_COIL_4UH_B  [PCB_COIL_4UH_B]  123.19,45.47 0 top
L12  PCB_COIL_4UH_B  [PCB_COIL_4UH_B]  149.1,45.47 0 top
L13  PCB_COIL_4UH_B  [PCB_COIL_4UH_B]  19.56,71.37 0 top
L14  PCB_COIL_4UH_B  [PCB_COIL_4UH_B]  45.47,71.37 0 top
L15  PCB_COIL_4UH_B  [PCB_COIL_4UH_B]  71.37,71.37 0 top
L16  PCB_COIL_4UH_B  [PCB_COIL_4UH_B]  97.28,71.37 0 top
L17  PCB_COIL_4UH_B  [PCB_COIL_4UH_B]  123.19,71.37 0 top
L18  PCB_COIL_4UH_B  [PCB_COIL_4UH_B]  149.1,71.37 0 top
L19  PCB_COIL_4UH_B  [PCB_COIL_4UH_B]  19.56,97.28 0 top
L20  PCB_COIL_4UH_B  [PCB_COIL_4UH_B]  45.47,97.28 0 top
L21  PCB_COIL_4UH_B  [PCB_COIL_4UH_B]  71.37,97.28 0 top
L22  PCB_COIL_4UH_B  [PCB_COIL_4UH_B]  97.28,97.28 0 top
L23  PCB_COIL_4UH_B  [PCB_COIL_4UH_B]  123.19,97.28 0 top
L24  PCB_COIL_4UH_B  [PCB_COIL_4UH_B]  149.1,97.28 0 top
LOGO1  OSHW-LOGOS  [OSHW-LOGO-S]  29.72,20.83 0 top
LOGO2  SFE_LOGO_NAME_FLAME.1_INCH  [SFE_LOGO_NAME_FLAME_.1]  19.56,28.19 0 top
LOGO3  QWIIC_LOGO_7MM  [QWIIC_7MM]  10.67,20.83 0 top
LOGO4  SFE_LOGO_NAME_FLAME.1_INCH  [SFE_LOGO_NAME_FLAME_.1]  19.56,28.19 0 bottom
LOGO5  OSHW-LOGOS  [OSHW-LOGO-S]  55.63,20.83 0 top
LOGO6  QWIIC_LOGO_7MM  [QWIIC_7MM]  36.58,20.83 0 top
LOGO7  SFE_LOGO_NAME_FLAME.1_INCH  [SFE_LOGO_NAME_FLAME_.1]  45.47,28.19 0 top
LOGO8  SFE_LOGO_NAME_FLAME.1_INCH  [SFE_LOGO_NAME_FLAME_.1]  45.47,28.19 0 bottom
LOGO9  OSHW-LOGOS  [OSHW-LOGO-S]  81.53,20.83 0 top
LOGO10  QWIIC_LOGO_7MM  [QWIIC_7MM]  62.48,20.83 0 top
LOGO11  SFE_LOGO_NAME_FLAME.1_INCH  [SFE_LOGO_NAME_FLAME_.1]  71.37,28.19 0 top
LOGO12  SFE_LOGO_NAME_FLAME.1_INCH  [SFE_LOGO_NAME_FLAME_.1]  71.37,28.19 0 bottom
LOGO13  OSHW-LOGOS  [OSHW-LOGO-S]  107.44,20.83 0 top
LOGO14  QWIIC_LOGO_7MM  [QWIIC_7MM]  88.39,20.83 0 top
LOGO15  SFE_LOGO_NAME_FLAME.1_INCH  [SFE_LOGO_NAME_FLAME_.1]  97.28,28.19 0 top
LOGO16  SFE_LOGO_NAME_FLAME.1_INCH  [SFE_LOGO_NAME_FLAME_.1]  97.28,28.19 0 bottom
LOGO17  OSHW-LOGOS  [OSHW-LOGO-S]  133.35,20.83 0 top
LOGO18  QWIIC_LOGO_7MM  [QWIIC_7MM]  114.3,20.83 0 top
LOGO19  SFE_LOGO_NAME_FLAME.1_INCH  [SFE_LOGO_NAME_FLAME_.1]  123.19,28.19 0 top
LOGO20  SFE_LOGO_NAME_FLAME.1_INCH  [SFE_LOGO_NAME_FLAME_.1]  123.19,28.19 0 bottom
LOGO21  OSHW-LOGOS  [OSHW-LOGO-S]  159.26,20.83 0 top
LOGO22  QWIIC_LOGO_7MM  [QWIIC_7MM]  140.21,20.83 0 top
LOGO23  SFE_LOGO_NAME_FLAME.1_INCH  [SFE_LOGO_NAME_FLAME_.1]  149.1,28.19 0 top
LOGO24  SFE_LOGO_NAME_FLAME.1_INCH  [SFE_LOGO_NAME_FLAME_.1]  149.1,28.19 0 bottom
LOGO25  OSHW-LOGOS  [OSHW-LOGO-S]  29.72,46.74 0 top
LOGO26  QWIIC_LOGO_7MM  [QWIIC_7MM]  10.67,46.74 0 top
LOGO27  SFE_LOGO_NAME_FLAME.1_INCH  [SFE_LOGO_NAME_FLAME_.1]  19.56,54.1 0 top
LOGO28  SFE_LOGO_NAME_FLAME.1_INCH  [SFE_LOGO_NAME_FLAME_.1]  19.56,54.1 0 bottom
LOGO29  OSHW-LOGOS  [OSHW-LOGO-S]  55.63,46.74 0 top
LOGO30  QWIIC_LOGO_7MM  [QWIIC_7MM]  36.58,46.74 0 top
LOGO31  SFE_LOGO_NAME_FLAME.1_INCH  [SFE_LOGO_NAME_FLAME_.1]  45.47,54.1 0 top
LOGO32  SFE_LOGO_NAME_FLAME.1_INCH  [SFE_LOGO_NAME_FLAME_.1]  45.47,54.1 0 bottom
LOGO33  OSHW-LOGOS  [OSHW-LOGO-S]  81.53,46.74 0 top
LOGO34  QWIIC_LOGO_7MM  [QWIIC_7MM]  62.48,46.74 0 top
LOGO35  SFE_LOGO_NAME_FLAME.1_INCH  [SFE_LOGO_NAME_FLAME_.1]  71.37,54.1 0 top
LOGO36  SFE_LOGO_NAME_FLAME.1_INCH  [SFE_LOGO_NAME_FLAME_.1]  71.37,54.1 0 bottom
LOGO37  OSHW-LOGOS  [OSHW-LOGO-S]  107.44,46.74 0 top
LOGO38  QWIIC_LOGO_7MM  [QWIIC_7MM]  88.39,46.74 0 top
LOGO39  SFE_LOGO_NAME_FLAME.1_INCH  [SFE_LOGO_NAME_FLAME_.1]  97.28,54.1 0 top
LOGO40  SFE_LOGO_NAME_FLAME.1_INCH  [SFE_LOGO_NAME_FLAME_.1]  97.28,54.1 0 bottom
LOGO41  OSHW-LOGOS  [OSHW-LOGO-S]  133.35,46.74 0 top
LOGO42  QWIIC_LOGO_7MM  [QWIIC_7MM]  114.3,46.74 0 top
LOGO43  SFE_LOGO_NAME_FLAME.1_INCH  [SFE_LOGO_NAME_FLAME_.1]  123.19,54.1 0 top
LOGO44  SFE_LOGO_NAME_FLAME.1_INCH  [SFE_LOGO_NAME_FLAME_.1]  123.19,54.1 0 bottom
LOGO45  OSHW-LOGOS  [OSHW-LOGO-S]  159.26,46.74 0 top
LOGO46  QWIIC_LOGO_7MM  [QWIIC_7MM]  140.21,46.74 0 top
LOGO47  SFE_LOGO_NAME_FLAME.1_INCH  [SFE_LOGO_NAME_FLAME_.1]  149.1,54.1 0 top
LOGO48  SFE_LOGO_NAME_FLAME.1_INCH  [SFE_LOGO_NAME_FLAME_.1]  149.1,54.1 0 bottom
LOGO49  OSHW-LOGOS  [OSHW-LOGO-S]  29.72,72.64 0 top
LOGO50  QWIIC_LOGO_7MM  [QWIIC_7MM]  10.67,72.64 0 top
LOGO51  SFE_LOGO_NAME_FLAME.1_INCH  [SFE_LOGO_NAME_FLAME_.1]  19.56,80.01 0 top
LOGO52  SFE_LOGO_NAME_FLAME.1_INCH  [SFE_LOGO_NAME_FLAME_.1]  19.56,80.01 0 bottom
LOGO53  OSHW-LOGOS  [OSHW-LOGO-S]  55.63,72.64 0 top
LOGO54  QWIIC_LOGO_7MM  [QWIIC_7MM]  36.58,72.64 0 top
LOGO55  SFE_LOGO_NAME_FLAME.1_INCH  [SFE_LOGO_NAME_FLAME_.1]  45.47,80.01 0 top
LOGO56  SFE_LOGO_NAME_FLAME.1_INCH  [SFE_LOGO_NAME_FLAME_.1]  45.47,80.01 0 bottom
LOGO57  OSHW-LOGOS  [OSHW-LOGO-S]  81.53,72.64 0 top
LOGO58  QWIIC_LOGO_7MM  [QWIIC_7MM]  62.48,72.64 0 top
LOGO59  SFE_LOGO_NAME_FLAME.1_INCH  [SFE_LOGO_NAME_FLAME_.1]  71.37,80.01 0 top
LOGO60  SFE_LOGO_NAME_FLAME.1_INCH  [SFE_LOGO_NAME_FLAME_.1]  71.37,80.01 0 bottom
LOGO61  OSHW-LOGOS  [OSHW-LOGO-S]  107.44,72.64 0 top
LOGO62  QWIIC_LOGO_7MM  [QWIIC_7MM]  88.39,72.64 0 top
LOGO63  SFE_LOGO_NAME_FLAME.1_INCH  [SFE_LOGO_NAME_FLAME_.1]  97.28,80.01 0 top
LOGO64  SFE_LOGO_NAME_FLAME.1_INCH  [SFE_LOGO_NAME_FLAME_.1]  97.28,80.01 0 bottom
LOGO65  OSHW-LOGOS  [OSHW-LOGO-S]  133.35,72.64 0 top
LOGO66  QWIIC_LOGO_7MM  [QWIIC_7MM]  114.3,72.64 0 top
LOGO67  SFE_LOGO_NAME_FLAME.1_INCH  [SFE_LOGO_NAME_FLAME_.1]  123.19,80.01 0 top
LOGO68  SFE_LOGO_NAME_FLAME.1_INCH  [SFE_LOGO_NAME_FLAME_.1]  123.19,80.01 0 bottom
LOGO69  OSHW-LOGOS  [OSHW-LOGO-S]  159.26,72.64 0 top
LOGO70  QWIIC_LOGO_7MM  [QWIIC_7MM]  140.21,72.64 0 top
LOGO71  SFE_LOGO_NAME_FLAME.1_INCH  [SFE_LOGO_NAME_FLAME_.1]  149.1,80.01 0 top
LOGO72  SFE_LOGO_NAME_FLAME.1_INCH  [SFE_LOGO_NAME_FLAME_.1]  149.1,80.01 0 bottom
LOGO73  OSHW-LOGOS  [OSHW-LOGO-S]  29.72,98.55 0 top
LOGO74  QWIIC_LOGO_7MM  [QWIIC_7MM]  10.67,98.55 0 top
LOGO75  SFE_LOGO_NAME_FLAME.1_INCH  [SFE_LOGO_NAME_FLAME_.1]  19.56,105.92 0 top
LOGO76  SFE_LOGO_NAME_FLAME.1_INCH  [SFE_LOGO_NAME_FLAME_.1]  19.56,105.92 0 bottom
LOGO77  OSHW-LOGOS  [OSHW-LOGO-S]  55.63,98.55 0 top
LOGO78  QWIIC_LOGO_7MM  [QWIIC_7MM]  36.58,98.55 0 top
LOGO79  SFE_LOGO_NAME_FLAME.1_INCH  [SFE_LOGO_NAME_FLAME_.1]  45.47,105.92 0 top
LOGO80  SFE_LOGO_NAME_FLAME.1_INCH  [SFE_LOGO_NAME_FLAME_.1]  45.47,105.92 0 bottom
LOGO81  OSHW-LOGOS  [OSHW-LOGO-S]  81.53,98.55 0 top
LOGO82  QWIIC_LOGO_7MM  [QWIIC_7MM]  62.48,98.55 0 top
LOGO83  SFE_LOGO_NAME_FLAME.1_INCH  [SFE_LOGO_NAME_FLAME_.1]  71.37,105.92 0 top
LOGO84  SFE_LOGO_NAME_FLAME.1_INCH  [SFE_LOGO_NAME_FLAME_.1]  71.37,105.92 0 bottom
LOGO85  OSHW-LOGOS  [OSHW-LOGO-S]  107.44,98.55 0 top
LOGO86  QWIIC_LOGO_7MM  [QWIIC_7MM]  88.39,98.55 0 top
LOGO87  SFE_LOGO_NAME_FLAME.1_INCH  [SFE_LOGO_NAME_FLAME_.1]  97.28,105.92 0 top
LOGO88  SFE_LOGO_NAME_FLAME.1_INCH  [SFE_LOGO_NAME_FLAME_.1]  97.28,105.92 0 bottom
LOGO89  OSHW-LOGOS  [OSHW-LOGO-S]  133.35,98.55 0 top
LOGO90  QWIIC_LOGO_7MM  [QWIIC_7MM]  114.3,98.55 0 top
LOGO91  SFE_LOGO_NAME_FLAME.1_INCH  [SFE_LOGO_NAME_FLAME_.1]  123.19,105.92 0 top
LOGO92  SFE_LOGO_NAME_FLAME.1_INCH  [SFE_LOGO_NAME_FLAME_.1]  123.19,105.92 0 bottom
LOGO93  OSHW-LOGOS  [OSHW-LOGO-S]  159.26,98.55 0 top
LOGO94  QWIIC_LOGO_7MM  [QWIIC_7MM]  140.21,98.55 0 top
LOGO95  SFE_LOGO_NAME_FLAME.1_INCH  [SFE_LOGO_NAME_FLAME_.1]  149.1,105.92 0 top
LOGO96  SFE_LOGO_NAME_FLAME.1_INCH  [SFE_LOGO_NAME_FLAME_.1]  149.1,105.92 0 bottom
R1  2.2k  [0603]  14.48,13.21 180 top
R2  2.2k  [0603]  14.48,15.75 180 top
R3  1k  [0603]  24.64,14.61 180 top
R4  10k  [0603]  24.64,12.7 0 top
R5  2.2k  [0603]  40.39,13.21 180 top
R6  2.2k  [0603]  40.39,15.75 180 top
R7  1k  [0603]  50.55,14.61 180 top
R8  10k  [0603]  50.55,12.7 0 top
R9  2.2k  [0603]  66.29,13.21 180 top
R10  2.2k  [0603]  66.29,15.75 180 top
R11  1k  [0603]  76.45,14.61 180 top
R12  10k  [0603]  76.45,12.7 0 top
R13  2.2k  [0603]  92.2,13.21 180 top
R14  2.2k  [0603]  92.2,15.75 180 top
R15  1k  [0603]  102.36,14.61 180 top
R16  10k  [0603]  102.36,12.7 0 top
R17  2.2k  [0603]  118.11,13.21 180 top
R18  2.2k  [0603]  118.11,15.75 180 top
R19  1k  [0603]  128.27,14.61 180 top
R20  10k  [0603]  128.27,12.7 0 top
R21  2.2k  [0603]  144.02,13.21 180 top
R22  2.2k  [0603]  144.02,15.75 180 top
R23  1k  [0603]  154.18,14.61 180 top
R24  10k  [0603]  154.18,12.7 0 top
R25  2.2k  [0603]  14.48,39.12 180 top
R26  2.2k  [0603]  14.48,41.66 180 top
R27  1k  [0603]  24.64,40.51 180 top
R28  10k  [0603]  24.64,38.61 0 top
R29  2.2k  [0603]  40.39,39.12 180 top
R30  2.2k  [0603]  40.39,41.66 180 top
R31  1k  [0603]  50.55,40.51 180 top
R32  10k  [0603]  50.55,38.61 0 top
R33  2.2k  [0603]  66.29,39.12 180 top
R34  2.2k  [0603]  66.29,41.66 180 top
R35  1k  [0603]  76.45,40.51 180 top
R36  10k  [0603]  76.45,38.61 0 top
R37  2.2k  [0603]  92.2,39.12 180 top
R38  2.2k  [0603]  92.2,41.66 180 top
R39  1k  [0603]  102.36,40.51 180 top
R40  10k  [0603]  102.36,38.61 0 top
R41  2.2k  [0603]  118.11,39.12 180 top
R42  2.2k  [0603]  118.11,41.66 180 top
R43  1k  [0603]  128.27,40.51 180 top
R44  10k  [0603]  128.27,38.61 0 top
R45  2.2k  [0603]  144.02,39.12 180 top
R46  2.2k  [0603]  144.02,41.66 180 top
R47  1k  [0603]  154.18,40.51 180 top
R48  10k  [0603]  154.18,38.61 0 top
R49  2.2k  [0603]  14.48,65.02 180 top
R50  2.2k  [0603]  14.48,67.56 180 top
R51  1k  [0603]  24.64,66.42 180 top
R52  10k  [0603]  24.64,64.52 0 top
R53  2.2k  [0603]  40.39,65.02 180 top
R54  2.2k  [0603]  40.39,67.56 180 top
R55  1k  [0603]  50.55,66.42 180 top
R56  10k  [0603]  50.55,64.52 0 top
R57  2.2k  [0603]  66.29,65.02 180 top
R58  2.2k  [0603]  66.29,67.56 180 top
R59  1k  [0603]  76.45,66.42 180 top
R60  10k  [0603]  76.45,64.52 0 top
R61  2.2k  [0603]  92.2,65.02 180 top
R62  2.2k  [0603]  92.2,67.56 180 top
R63  1k  [0603]  102.36,66.42 180 top
R64  10k  [0603]  102.36,64.52 0 top
R65  2.2k  [0603]  118.11,65.02 180 top
R66  2.2k  [0603]  118.11,67.56 180 top
R67  1k  [0603]  128.27,66.42 180 top
R68  10k  [0603]  128.27,64.52 0 top
R69  2.2k  [0603]  144.02,65.02 180 top
R70  2.2k  [0603]  144.02,67.56 180 top
R71  1k  [0603]  154.18,66.42 180 top
R72  10k  [0603]  154.18,64.52 0 top
R73  2.2k  [0603]  14.48,90.93 180 top
R74  2.2k  [0603]  14.48,93.47 180 top
R75  1k  [0603]  24.64,92.33 180 top
R76  10k  [0603]  24.64,90.42 0 top
R77  2.2k  [0603]  40.39,90.93 180 top
R78  2.2k  [0603]  40.39,93.47 180 top
R79  1k  [0603]  50.55,92.33 180 top
R80  10k  [0603]  50.55,90.42 0 top
R81  2.2k  [0603]  66.29,90.93 180 top
R82  2.2k  [0603]  66.29,93.47 180 top
R83  1k  [0603]  76.45,92.33 180 top
R84  10k  [0603]  76.45,90.42 0 top
R85  2.2k  [0603]  92.2,90.93 180 top
R86  2.2k  [0603]  92.2,93.47 180 top
R87  1k  [0603]  102.36,92.33 180 top
R88  10k  [0603]  102.36,90.42 0 top
R89  2.2k  [0603]  118.11,90.93 180 top
R90  2.2k  [0603]  118.11,93.47 180 top
R91  1k  [0603]  128.27,92.33 180 top
R92  10k  [0603]  128.27,90.42 0 top
R93  2.2k  [0603]  144.02,90.93 180 top
R94  2.2k  [0603]  144.02,93.47 180 top
R95  1k  [0603]  154.18,92.33 180 top
R96  10k  [0603]  154.18,90.42 0 top
U1  ST25DV64KC  [SO08]  19.56,13.21 180 top
U2  ST25DV64KC  [SO08]  45.47,13.21 180 top
U3  ST25DV64KC  [SO08]  71.37,13.21 180 top
U4  ST25DV64KC  [SO08]  97.28,13.21 180 top
U5  ST25DV64KC  [SO08]  123.19,13.21 180 top
U6  ST25DV64KC  [SO08]  149.1,13.21 180 top
U7  ST25DV64KC  [SO08]  19.56,39.12 180 top
U8  ST25DV64KC  [SO08]  45.47,39.12 180 top
U9  ST25DV64KC  [SO08]  71.37,39.12 180 top
U10  ST25DV64KC  [SO08]  97.28,39.12 180 top
U11  ST25DV64KC  [SO08]  123.19,39.12 180 top
U12  ST25DV64KC  [SO08]  149.1,39.12 180 top
U13  ST25DV64KC  [SO08]  19.56,65.02 180 top
U14  ST25DV64KC  [SO08]  45.47,65.02 180 top
U15  ST25DV64KC  [SO08]  71.37,65.02 180 top
U16  ST25DV64KC  [SO08]  97.28,65.02 180 top
U17  ST25DV64KC  [SO08]  123.19,65.02 180 top
U18  ST25DV64KC  [SO08]  149.1,65.02 180 top
U19  ST25DV64KC  [SO08]  19.56,90.93 180 top
U20  ST25DV64KC  [SO08]  45.47,90.93 180 top
U21  ST25DV64KC  [SO08]  71.37,90.93 180 top
U22  ST25DV64KC  [SO08]  97.28,90.93 180 top
U23  ST25DV64KC  [SO08]  123.19,90.93 180 top
U24  ST25DV64KC  [SO08]  149.1,90.93 180 top
U$1  [#I2C#0]  13.84,15.75 0 bottom
U$2  [PWR11]  50.55,17.65 0 top
U$3  [#3V3#0]  15.75,8.64 90 bottom
U$4  [##GPO##9]  51.18,14.48 0 bottom
U$5  [#LED#10]  51.18,18.29 0 bottom
U$6  [#GND#4]  39.12,8.64 90 bottom
U$7  [#SDA#5]  44.2,8.64 90 bottom
U$8  [#SCL#6]  46.74,8.64 90 bottom
U$9  [PWR11]  24.64,17.65 0 top
U$10  [DYNAMIC_RFID_TAG0]  19.56,23.62 0 top
U$11  [DYNAMIC_RFID_TAG0]  19.56,23.62 0 bottom
U$12  [##GPO##8]  49.28,8.64 90 bottom
U$13  [ST25DV64KC5984]  19.56,25.65 0 top
U$14  [#VEH#7]  51.82,8.64 90 bottom
U$15  [ST25DV64KC5984]  45.47,25.65 0 top
U$16  [##GPO##9]  25.27,14.48 0 bottom
U$17  [#LED#10]  25.27,18.29 0 bottom
U$18  [#GND#4]  13.21,8.64 90 bottom
U$19  [ST25DV64KC5984]  45.47,25.65 0 bottom
U$20  [#SDA#5]  18.29,8.64 90 bottom
U$21  [#SCL#6]  20.83,8.64 90 bottom
U$22  [##GPO##8]  23.37,8.64 90 bottom
U$23  [#VEH#7]  25.91,8.64 90 bottom
U$24  [ST25DV64KC5984]  19.56,25.65 0 bottom
U$25  [DYNAMIC_RFID_TAG0]  45.47,23.62 0 top
U$26  [DYNAMIC_RFID_TAG0]  45.47,23.62 0 bottom
U$27  [#I2C#0]  39.75,15.75 0 bottom
U$28  [#3V3#0]  41.66,8.64 90 bottom
U$29  [PWR11]  76.45,17.65 0 top
U$30  [##GPO##9]  77.09,14.48 0 bottom
U$31  [#LED#10]  77.09,18.29 0 bottom
U$32  [#GND#4]  65.02,8.64 90 bottom
U$33  [#SDA#5]  70.1,8.64 90 bottom
U$34  [#SCL#6]  72.64,8.64 90 bottom
U$35  [##GPO##8]  75.18,8.64 90 bottom
U$36  [#VEH#7]  77.72,8.64 90 bottom
U$37  [ST25DV64KC5984]  71.37,25.65 0 top
U$38  [ST25DV64KC5984]  71.37,25.65 0 bottom
U$39  [DYNAMIC_RFID_TAG0]  71.37,23.62 0 top
U$40  [DYNAMIC_RFID_TAG0]  71.37,23.62 0 bottom
U$41  [#I2C#0]  65.66,15.75 0 bottom
U$42  [#3V3#0]  67.56,8.64 90 bottom
U$43  [PWR11]  102.36,17.65 0 top
U$44  [##GPO##9]  103,14.48 0 bottom
U$45  [#LED#10]  103,18.29 0 bottom
U$46  [#GND#4]  90.93,8.64 90 bottom
U$47  [#SDA#5]  96.01,8.64 90 bottom
U$48  [#SCL#6]  98.55,8.64 90 bottom
U$49  [##GPO##8]  101.09,8.64 90 bottom
U$50  [#VEH#7]  103.63,8.64 90 bottom
U$51  [ST25DV64KC5984]  97.28,25.65 0 top
U$52  [ST25DV64KC5984]  97.28,25.65 0 bottom
U$53  [DYNAMIC_RFID_TAG0]  97.28,23.62 0 top
U$54  [DYNAMIC_RFID_TAG0]  97.28,23.62 0 bottom
U$55  [#I2C#0]  91.57,15.75 0 bottom
U$56  [#3V3#0]  93.47,8.64 90 bottom
U$57  [PWR11]  128.27,17.65 0 top
U$58  [##GPO##9]  128.91,14.48 0 bottom
U$59  [#LED#10]  128.91,18.29 0 bottom
U$60  [#GND#4]  116.84,8.64 90 bottom
U$61  [#SDA#5]  121.92,8.64 90 bottom
U$62  [#SCL#6]  124.46,8.64 90 bottom
U$63  [##GPO##8]  127,8.64 90 bottom
U$64  [#VEH#7]  129.54,8.64 90 bottom
U$65  [ST25DV64KC5984]  123.19,25.65 0 top
U$66  [ST25DV64KC5984]  123.19,25.65 0 bottom
U$67  [DYNAMIC_RFID_TAG0]  123.19,23.62 0 top
U$68  [DYNAMIC_RFID_TAG0]  123.19,23.62 0 bottom
U$69  [#I2C#0]  117.48,15.75 0 bottom
U$70  [#3V3#0]  119.38,8.64 90 bottom
U$71  [PWR11]  154.18,17.65 0 top
U$72  [##GPO##9]  154.81,14.48 0 bottom
U$73  [#LED#10]  154.81,18.29 0 bottom
U$74  [#GND#4]  142.75,8.64 90 bottom
U$75  [#SDA#5]  147.83,8.64 90 bottom
U$76  [#SCL#6]  150.37,8.64 90 bottom
U$77  [##GPO##8]  152.91,8.64 90 bottom
U$78  [#VEH#7]  155.45,8.64 90 bottom
U$79  [ST25DV64KC5984]  149.1,25.65 0 top
U$80  [ST25DV64KC5984]  149.1,25.65 0 bottom
U$81  [DYNAMIC_RFID_TAG0]  149.1,23.62 0 top
U$82  [DYNAMIC_RFID_TAG0]  149.1,23.62 0 bottom
U$83  [#I2C#0]  143.38,15.75 0 bottom
U$84  [#3V3#0]  145.29,8.64 90 bottom
U$85  [PWR11]  24.64,43.56 0 top
U$86  [##GPO##9]  25.27,40.39 0 bottom
U$87  [#LED#10]  25.27,44.2 0 bottom
U$88  [#GND#4]  13.21,34.54 90 bottom
U$89  [#SDA#5]  18.29,34.54 90 bottom
U$90  [#SCL#6]  20.83,34.54 90 bottom
U$91  [##GPO##8]  23.37,34.54 90 bottom
U$92  [#VEH#7]  25.91,34.54 90 bottom
U$93  [ST25DV64KC5984]  19.56,51.56 0 top
U$94  [ST25DV64KC5984]  19.56,51.56 0 bottom
U$95  [DYNAMIC_RFID_TAG0]  19.56,49.53 0 top
U$96  [DYNAMIC_RFID_TAG0]  19.56,49.53 0 bottom
U$97  [#I2C#0]  13.84,41.66 0 bottom
U$98  [#3V3#0]  15.75,34.54 90 bottom
U$99  [PWR11]  50.55,43.56 0 top
U$100  [##GPO##9]  51.18,40.39 0 bottom
U$101  [#LED#10]  51.18,44.2 0 bottom
U$102  [#GND#4]  39.12,34.54 90 bottom
U$103  [#SDA#5]  44.2,34.54 90 bottom
U$104  [#SCL#6]  46.74,34.54 90 bottom
U$105  [##GPO##8]  49.28,34.54 90 bottom
U$106  [#VEH#7]  51.82,34.54 90 bottom
U$107  [ST25DV64KC5984]  45.47,51.56 0 top
U$108  [ST25DV64KC5984]  45.47,51.56 0 bottom
U$109  [DYNAMIC_RFID_TAG0]  45.47,49.53 0 top
U$110  [DYNAMIC_RFID_TAG0]  45.47,49.53 0 bottom
U$111  [#I2C#0]  39.75,41.66 0 bottom
U$112  [#3V3#0]  41.66,34.54 90 bottom
U$113  [PWR11]  76.45,43.56 0 top
U$114  [##GPO##9]  77.09,40.39 0 bottom
U$115  [#LED#10]  77.09,44.2 0 bottom
U$116  [#GND#4]  65.02,34.54 90 bottom
U$117  [#SDA#5]  70.1,34.54 90 bottom
U$118  [#SCL#6]  72.64,34.54 90 bottom
U$119  [##GPO##8]  75.18,34.54 90 bottom
U$120  [#VEH#7]  77.72,34.54 90 bottom
U$121  [ST25DV64KC5984]  71.37,51.56 0 top
U$122  [ST25DV64KC5984]  71.37,51.56 0 bottom
U$123  [DYNAMIC_RFID_TAG0]  71.37,49.53 0 top
U$124  [DYNAMIC_RFID_TAG0]  71.37,49.53 0 bottom
U$125  [#I2C#0]  65.66,41.66 0 bottom
U$126  [#3V3#0]  67.56,34.54 90 bottom
U$127  [PWR11]  102.36,43.56 0 top
U$128  [##GPO##9]  103,40.39 0 bottom
U$129  [#LED#10]  103,44.2 0 bottom
U$130  [#GND#4]  90.93,34.54 90 bottom
U$131  [#SDA#5]  96.01,34.54 90 bottom
U$132  [#SCL#6]  98.55,34.54 90 bottom
U$133  [##GPO##8]  101.09,34.54 90 bottom
U$134  [#VEH#7]  103.63,34.54 90 bottom
U$135  [ST25DV64KC5984]  97.28,51.56 0 top
U$136  [ST25DV64KC5984]  97.28,51.56 0 bottom
U$137  [DYNAMIC_RFID_TAG0]  97.28,49.53 0 top
U$138  [DYNAMIC_RFID_TAG0]  97.28,49.53 0 bottom
U$139  [#I2C#0]  91.57,41.66 0 bottom
U$140  [#3V3#0]  93.47,34.54 90 bottom
U$141  [PWR11]  128.27,43.56 0 top
U$142  [##GPO##9]  128.91,40.39 0 bottom
U$143  [#LED#10]  128.91,44.2 0 bottom
U$144  [#GND#4]  116.84,34.54 90 bottom
U$145  [#SDA#5]  121.92,34.54 90 bottom
U$146  [#SCL#6]  124.46,34.54 90 bottom
U$147  [##GPO##8]  127,34.54 90 bottom
U$148  [#VEH#7]  129.54,34.54 90 bottom
U$149  [ST25DV64KC5984]  123.19,51.56 0 top
U$150  [ST25DV64KC5984]  123.19,51.56 0 bottom
U$151  [DYNAMIC_RFID_TAG0]  123.19,49.53 0 top
U$152  [DYNAMIC_RFID_TAG0]  123.19,49.53 0 bottom
U$153  [#I2C#0]  117.48,41.66 0 bottom
U$154  [#3V3#0]  119.38,34.54 90 bottom
U$155  [PWR11]  154.18,43.56 0 top
U$156  [##GPO##9]  154.81,40.39 0 bottom
U$157  [#LED#10]  154.81,44.2 0 bottom
U$158  [#GND#4]  142.75,34.54 90 bottom
U$159  [#SDA#5]  147.83,34.54 90 bottom
U$160  [#SCL#6]  150.37,34.54 90 bottom
U$161  [##GPO##8]  152.91,34.54 90 bottom
U$162  [#VEH#7]  155.45,34.54 90 bottom
U$163  [ST25DV64KC5984]  149.1,51.56 0 top
U$164  [ST25DV64KC5984]  149.1,51.56 0 bottom
U$165  [DYNAMIC_RFID_TAG0]  149.1,49.53 0 top
U$166  [DYNAMIC_RFID_TAG0]  149.1,49.53 0 bottom
U$167  [#I2C#0]  143.38,41.66 0 bottom
U$168  [#3V3#0]  145.29,34.54 90 bottom
U$169  [PWR11]  24.64,69.47 0 top
U$170  [##GPO##9]  25.27,66.29 0 bottom
U$171  [#LED#10]  25.27,70.1 0 bottom
U$172  [#GND#4]  13.21,60.45 90 bottom
U$173  [#SDA#5]  18.29,60.45 90 bottom
U$174  [#SCL#6]  20.83,60.45 90 bottom
U$175  [##GPO##8]  23.37,60.45 90 bottom
U$176  [#VEH#7]  25.91,60.45 90 bottom
U$177  [ST25DV64KC5984]  19.56,77.47 0 top
U$178  [ST25DV64KC5984]  19.56,77.47 0 bottom
U$179  [DYNAMIC_RFID_TAG0]  19.56,75.44 0 top
U$180  [DYNAMIC_RFID_TAG0]  19.56,75.44 0 bottom
U$181  [#I2C#0]  13.84,67.56 0 bottom
U$182  [#3V3#0]  15.75,60.45 90 bottom
U$183  [PWR11]  50.55,69.47 0 top
U$184  [##GPO##9]  51.18,66.29 0 bottom
U$185  [#LED#10]  51.18,70.1 0 bottom
U$186  [#GND#4]  39.12,60.45 90 bottom
U$187  [#SDA#5]  44.2,60.45 90 bottom
U$188  [#SCL#6]  46.74,60.45 90 bottom
U$189  [##GPO##8]  49.28,60.45 90 bottom
U$190  [#VEH#7]  51.82,60.45 90 bottom
U$191  [ST25DV64KC5984]  45.47,77.47 0 top
U$192  [ST25DV64KC5984]  45.47,77.47 0 bottom
U$193  [DYNAMIC_RFID_TAG0]  45.47,75.44 0 top
U$194  [DYNAMIC_RFID_TAG0]  45.47,75.44 0 bottom
U$195  [#I2C#0]  39.75,67.56 0 bottom
U$196  [#3V3#0]  41.66,60.45 90 bottom
U$197  [PWR11]  76.45,69.47 0 top
U$198  [##GPO##9]  77.09,66.29 0 bottom
U$199  [#LED#10]  77.09,70.1 0 bottom
U$200  [#GND#4]  65.02,60.45 90 bottom
U$201  [#SDA#5]  70.1,60.45 90 bottom
U$202  [#SCL#6]  72.64,60.45 90 bottom
U$203  [##GPO##8]  75.18,60.45 90 bottom
U$204  [#VEH#7]  77.72,60.45 90 bottom
U$205  [ST25DV64KC5984]  71.37,77.47 0 top
U$206  [ST25DV64KC5984]  71.37,77.47 0 bottom
U$207  [DYNAMIC_RFID_TAG0]  71.37,75.44 0 top
U$208  [DYNAMIC_RFID_TAG0]  71.37,75.44 0 bottom
U$209  [#I2C#0]  65.66,67.56 0 bottom
U$210  [#3V3#0]  67.56,60.45 90 bottom
U$211  [PWR11]  102.36,69.47 0 top
U$212  [##GPO##9]  103,66.29 0 bottom
U$213  [#LED#10]  103,70.1 0 bottom
U$214  [#GND#4]  90.93,60.45 90 bottom
U$215  [#SDA#5]  96.01,60.45 90 bottom
U$216  [#SCL#6]  98.55,60.45 90 bottom
U$217  [##GPO##8]  101.09,60.45 90 bottom
U$218  [#VEH#7]  103.63,60.45 90 bottom
U$219  [ST25DV64KC5984]  97.28,77.47 0 top
U$220  [ST25DV64KC5984]  97.28,77.47 0 bottom
U$221  [DYNAMIC_RFID_TAG0]  97.28,75.44 0 top
U$222  [DYNAMIC_RFID_TAG0]  97.28,75.44 0 bottom
U$223  [#I2C#0]  91.57,67.56 0 bottom
U$224  [#3V3#0]  93.47,60.45 90 bottom
U$225  [PWR11]  128.27,69.47 0 top
U$226  [##GPO##9]  128.91,66.29 0 bottom
U$227  [#LED#10]  128.91,70.1 0 bottom
U$228  [#GND#4]  116.84,60.45 90 bottom
U$229  [#SDA#5]  121.92,60.45 90 bottom
U$230  [#SCL#6]  124.46,60.45 90 bottom
U$231  [##GPO##8]  127,60.45 90 bottom
U$232  [#VEH#7]  129.54,60.45 90 bottom
U$233  [ST25DV64KC5984]  123.19,77.47 0 top
U$234  [ST25DV64KC5984]  123.19,77.47 0 bottom
U$235  [DYNAMIC_RFID_TAG0]  123.19,75.44 0 top
U$236  [DYNAMIC_RFID_TAG0]  123.19,75.44 0 bottom
U$237  [#I2C#0]  117.48,67.56 0 bottom
U$238  [#3V3#0]  119.38,60.45 90 bottom
U$239  [PWR11]  154.18,69.47 0 top
U$240  [##GPO##9]  154.81,66.29 0 bottom
U$241  [#LED#10]  154.81,70.1 0 bottom
U$242  [#GND#4]  142.75,60.45 90 bottom
U$243  [#SDA#5]  147.83,60.45 90 bottom
U$244  [#SCL#6]  150.37,60.45 90 bottom
U$245  [##GPO##8]  152.91,60.45 90 bottom
U$246  [#VEH#7]  155.45,60.45 90 bottom
U$247  [ST25DV64KC5984]  149.1,77.47 0 top
U$248  [ST25DV64KC5984]  149.1,77.47 0 bottom
U$249  [DYNAMIC_RFID_TAG0]  149.1,75.44 0 top
U$250  [DYNAMIC_RFID_TAG0]  149.1,75.44 0 bottom
U$251  [#I2C#0]  143.38,67.56 0 bottom
U$252  [#3V3#0]  145.29,60.45 90 bottom
U$253  [PWR11]  24.64,95.38 0 top
U$254  [##GPO##9]  25.27,92.2 0 bottom
U$255  [#LED#10]  25.27,96.01 0 bottom
U$256  [#GND#4]  13.21,86.36 90 bottom
U$257  [#SDA#5]  18.29,86.36 90 bottom
U$258  [#SCL#6]  20.83,86.36 90 bottom
U$259  [##GPO##8]  23.37,86.36 90 bottom
U$260  [#VEH#7]  25.91,86.36 90 bottom
U$261  [ST25DV64KC5984]  19.56,103.38 0 top
U$262  [ST25DV64KC5984]  19.56,103.38 0 bottom
U$263  [DYNAMIC_RFID_TAG0]  19.56,101.35 0 top
U$264  [DYNAMIC_RFID_TAG0]  19.56,101.35 0 bottom
U$265  [#I2C#0]  13.84,93.47 0 bottom
U$266  [#3V3#0]  15.75,86.36 90 bottom
U$267  [PWR11]  50.55,95.38 0 top
U$268  [##GPO##9]  51.18,92.2 0 bottom
U$269  [#LED#10]  51.18,96.01 0 bottom
U$270  [#GND#4]  39.12,86.36 90 bottom
U$271  [#SDA#5]  44.2,86.36 90 bottom
U$272  [#SCL#6]  46.74,86.36 90 bottom
U$273  [##GPO##8]  49.28,86.36 90 bottom
U$274  [#VEH#7]  51.82,86.36 90 bottom
U$275  [ST25DV64KC5984]  45.47,103.38 0 top
U$276  [ST25DV64KC5984]  45.47,103.38 0 bottom
U$277  [DYNAMIC_RFID_TAG0]  45.47,101.35 0 top
U$278  [DYNAMIC_RFID_TAG0]  45.47,101.35 0 bottom
U$279  [#I2C#0]  39.75,93.47 0 bottom
U$280  [#3V3#0]  41.66,86.36 90 bottom
U$281  [PWR11]  76.45,95.38 0 top
U$282  [##GPO##9]  77.09,92.2 0 bottom
U$283  [#LED#10]  77.09,96.01 0 bottom
U$284  [#GND#4]  65.02,86.36 90 bottom
U$285  [#SDA#5]  70.1,86.36 90 bottom
U$286  [#SCL#6]  72.64,86.36 90 bottom
U$287  [##GPO##8]  75.18,86.36 90 bottom
U$288  [#VEH#7]  77.72,86.36 90 bottom
U$289  [ST25DV64KC5984]  71.37,103.38 0 top
U$290  [ST25DV64KC5984]  71.37,103.38 0 bottom
U$291  [DYNAMIC_RFID_TAG0]  71.37,101.35 0 top
U$292  [DYNAMIC_RFID_TAG0]  71.37,101.35 0 bottom
U$293  [#I2C#0]  65.66,93.47 0 bottom
U$294  [#3V3#0]  67.56,86.36 90 bottom
U$295  [PWR11]  102.36,95.38 0 top
U$296  [##GPO##9]  103,92.2 0 bottom
U$297  [#LED#10]  103,96.01 0 bottom
U$298  [#GND#4]  90.93,86.36 90 bottom
U$299  [#SDA#5]  96.01,86.36 90 bottom
U$300  [#SCL#6]  98.55,86.36 90 bottom
U$301  [##GPO##8]  101.09,86.36 90 bottom
U$302  [#VEH#7]  103.63,86.36 90 bottom
U$303  [ST25DV64KC5984]  97.28,103.38 0 top
U$304  [ST25DV64KC5984]  97.28,103.38 0 bottom
U$305  [DYNAMIC_RFID_TAG0]  97.28,101.35 0 top
U$306  [DYNAMIC_RFID_TAG0]  97.28,101.35 0 bottom
U$307  [#I2C#0]  91.57,93.47 0 bottom
U$308  [#3V3#0]  93.47,86.36 90 bottom
U$309  [PWR11]  128.27,95.38 0 top
U$310  [##GPO##9]  128.91,92.2 0 bottom
U$311  [#LED#10]  128.91,96.01 0 bottom
U$312  [#GND#4]  116.84,86.36 90 bottom
U$313  [#SDA#5]  121.92,86.36 90 bottom
U$314  [#SCL#6]  124.46,86.36 90 bottom
U$315  [##GPO##8]  127,86.36 90 bottom
U$316  [#VEH#7]  129.54,86.36 90 bottom
U$317  [ST25DV64KC5984]  123.19,103.38 0 top
U$318  [ST25DV64KC5984]  123.19,103.38 0 bottom
U$319  [DYNAMIC_RFID_TAG0]  123.19,101.35 0 top
U$320  [DYNAMIC_RFID_TAG0]  123.19,101.35 0 bottom
U$321  [#I2C#0]  117.48,93.47 0 bottom
U$322  [#3V3#0]  119.38,86.36 90 bottom
U$323  [PWR11]  154.18,95.38 0 top
U$324  [##GPO##9]  154.81,92.2 0 bottom
U$325  [#LED#10]  154.81,96.01 0 bottom
U$326  [#GND#4]  142.75,86.36 90 bottom
U$327  [#SDA#5]  147.83,86.36 90 bottom
U$328  [#SCL#6]  150.37,86.36 90 bottom
U$329  [##GPO##8]  152.91,86.36 90 bottom
U$330  [#VEH#7]  155.45,86.36 90 bottom
U$331  [ST25DV64KC5984]  149.1,103.38 0 top
U$332  [ST25DV64KC5984]  149.1,103.38 0 bottom
U$333  [DYNAMIC_RFID_TAG0]  149.1,101.35 0 top
U$334  [DYNAMIC_RFID_TAG0]  149.1,101.35 0 bottom
U$335  [#I2C#0]  143.38,93.47 0 bottom
U$336  [#3V3#0]  145.29,86.36 90 bottom